# EAGLE board intech-senpai-camion-grue-complet (EAGLE 8.6.0), part 1 of 3
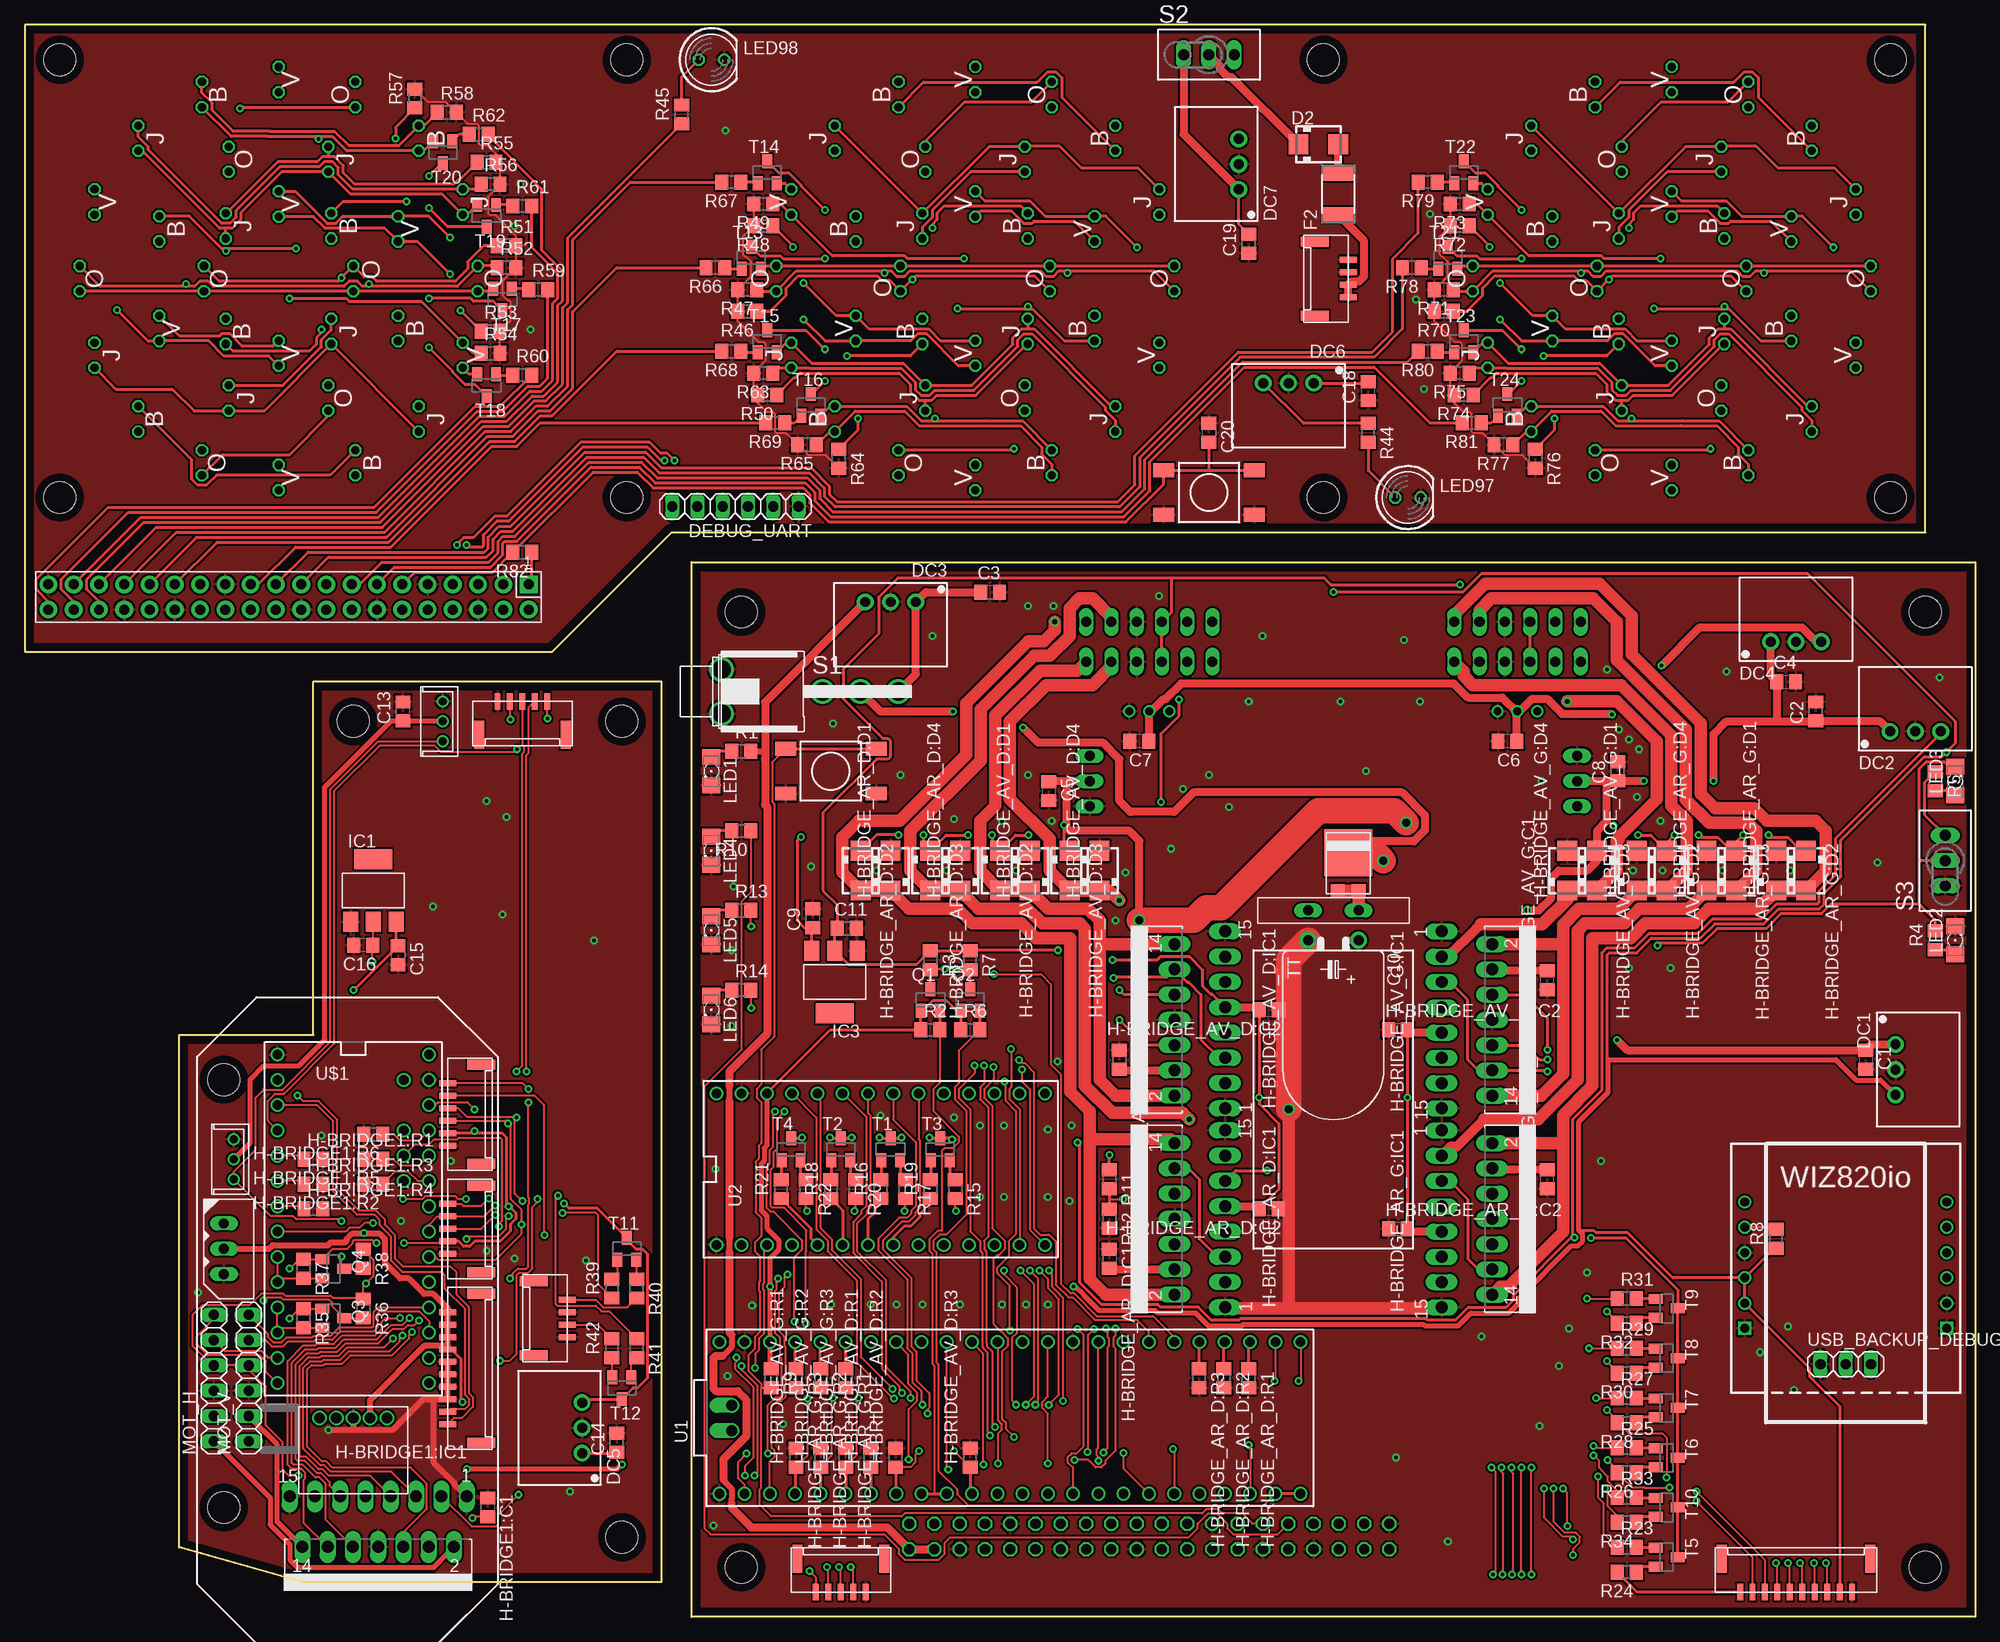
[diagram p0: board, top side]
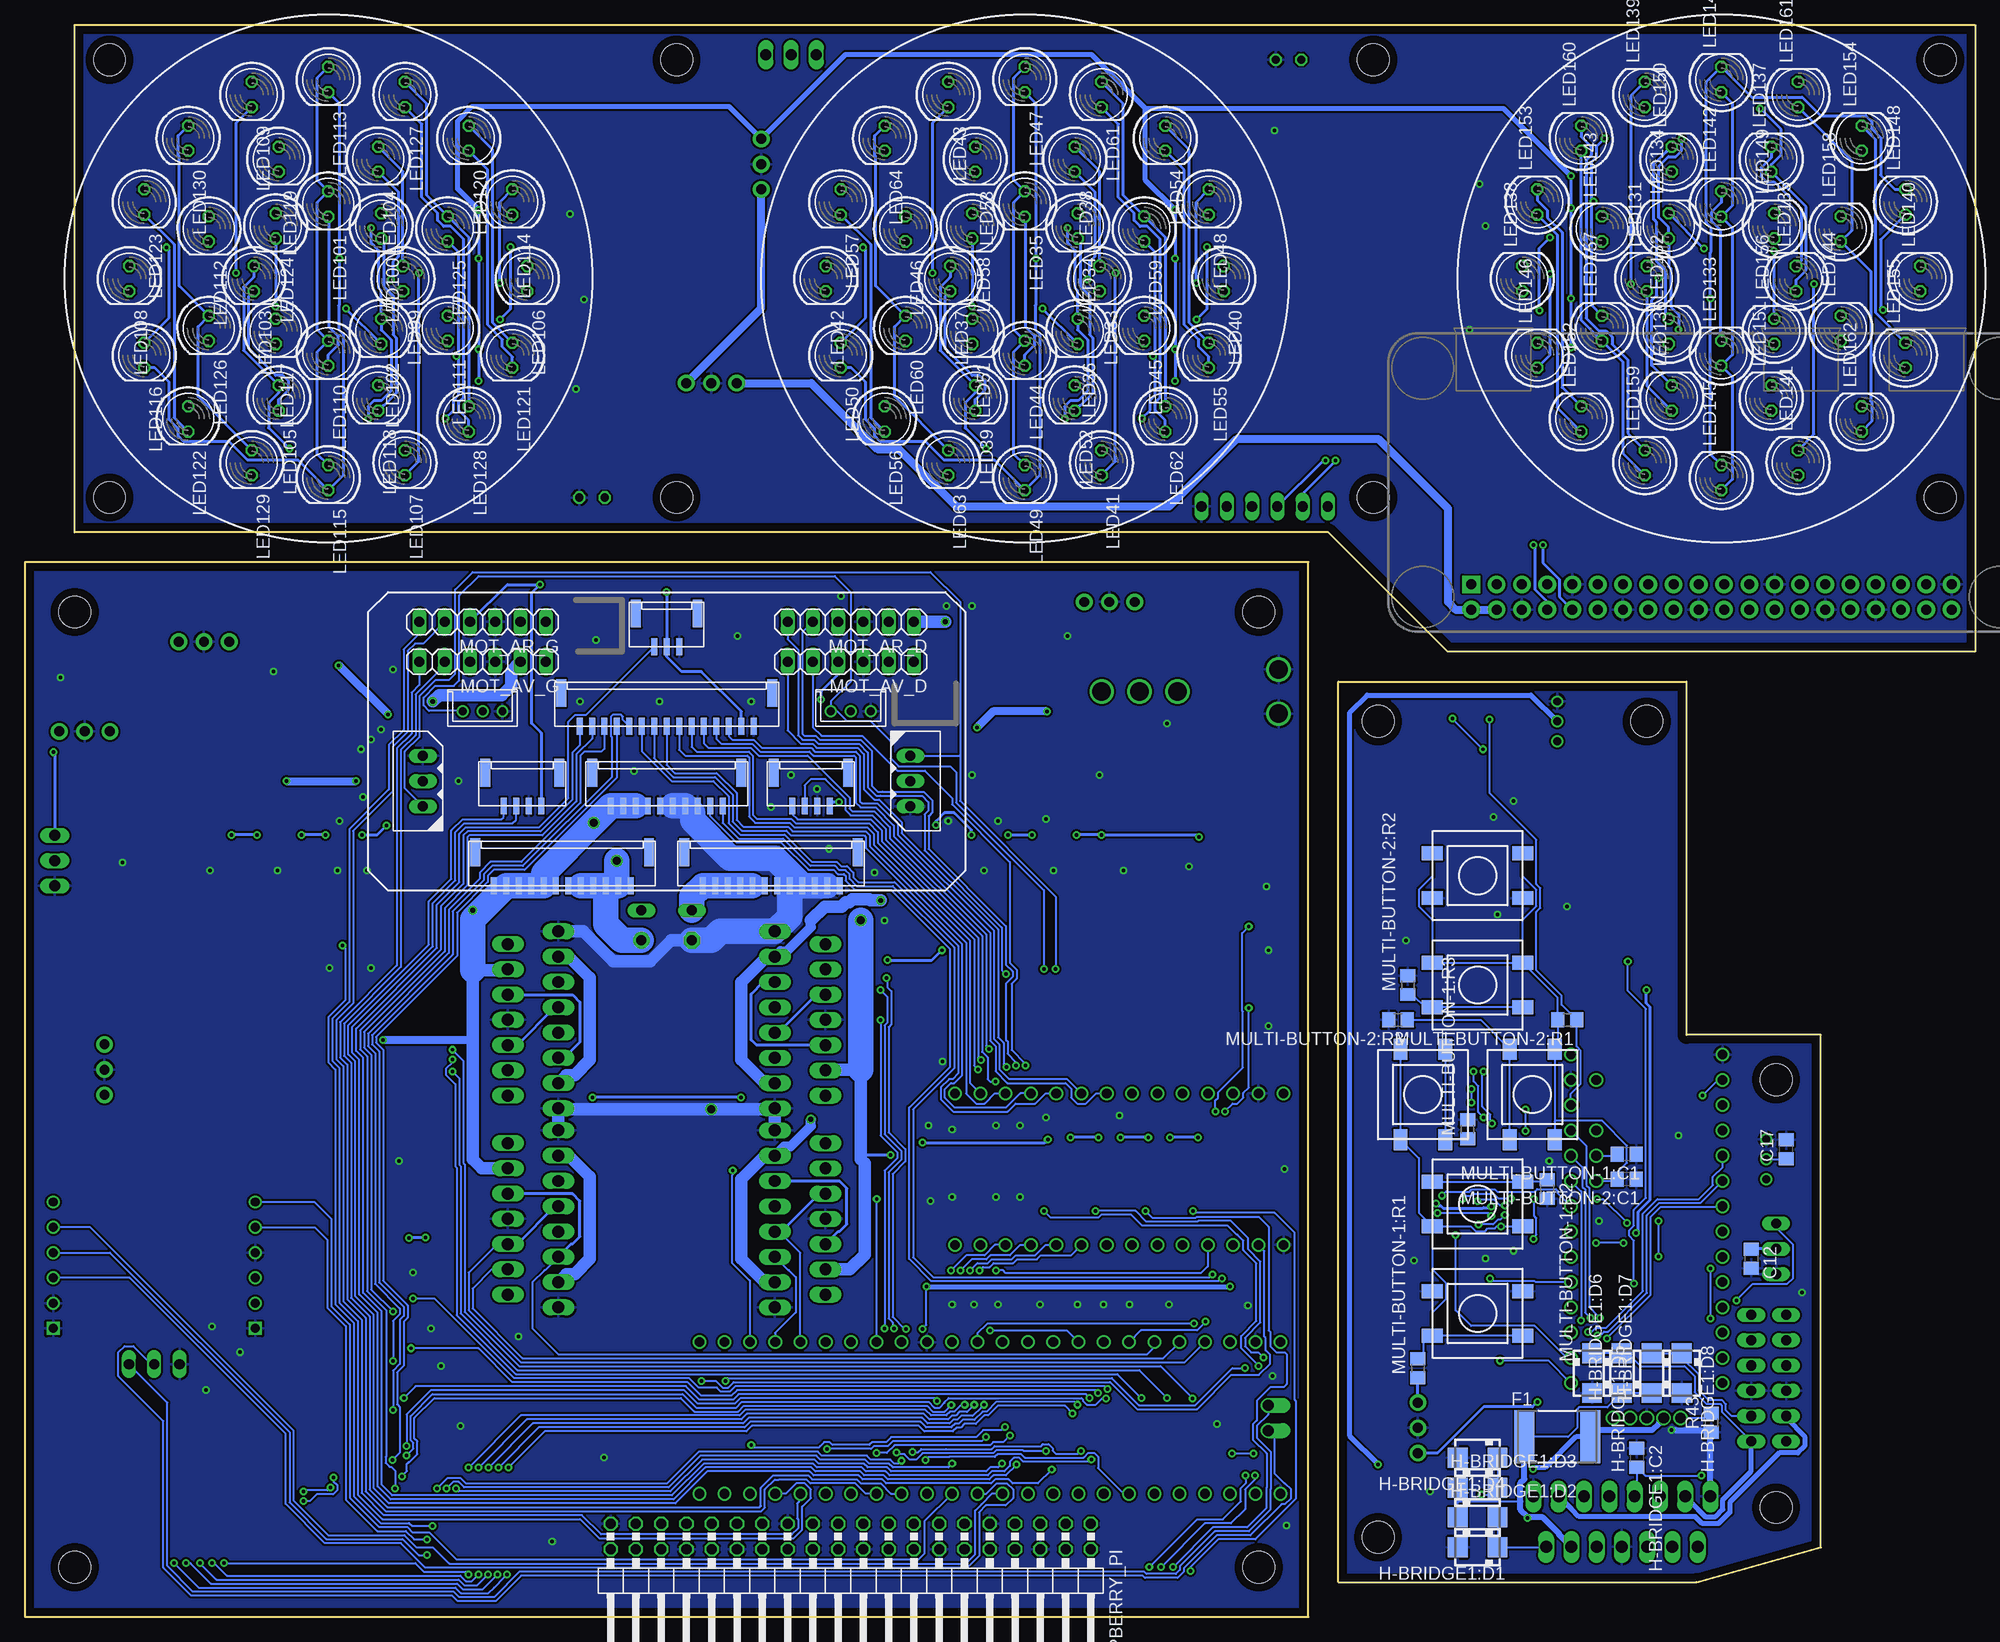
[diagram p1: board, bottom side, seen from below]

Size 196 x 160 mm. Coordinates in mm from the lower left corner, seen from the top.
Outline: 67,0 67,106 196,106 196,0 67,0
Outline: 64,3.5 64,94 29,94 29,58.5 15.5,58.5 15.5,7 28,3.5 64,3.5
Outline: 191,109 191,160 0,160 0,97 53,97 65,109 191,109
Copper layers (1*16): Top 0.035mm / dielectric 1.5mm / Bottom 0.035mm
Design rules "sg_default *": minimum track width 0.2mm, minimum drill 0.35mm, track to track 0.2mm, track to pad 0.2mm, pad to pad 0.2mm, via to via 0.2mm, smd to smd 0.2mm, copper to edge 0.8mm, drill to drill 0.2mm, minimum pad ring 0.2mm, minimum via ring 8mil, stop-mask expansion 4mil, vias tented up to drill 1mm, thermal gap 10mil
Holes 3.2 mm at 72,5 72,101 191,101 191,5 60,8 20,11 20,54 60,90 33,90 3.5,112.5 3.5,156.5 187.5,112.5 187.5,156.5 130.5,112.5 130.5,156.5 60.5,112.5 60.5,156.5
tKeepout: area 17,8 to 23,14; area 17,51 to 23,57; area 57,5 to 63,11; area 30,87 to 36,93; area 57,87 to 63,93
bKeepout: area 15.5,6.5 to 24.5,15.5; area 15.5,49.5 to 24.5,58.5; area 55.5,3.5 to 64.5,12.5; area 55.5,85.5 to 64.5,94.5; area 28.5,85.5 to 37.5,94.5

## Footprints (pad centres in the part's own frame; a part is rotated, then mirrored left to right if it is on the bottom)
GH-12-V = smd 0.6 x 1.7: 1 -6.875,2.5; 2 -5.625,2.5; 3 -4.375,2.5; 4 -3.125,2.5; 5 -1.875,2.5; 6 -0.625,2.5; 7 0.625,2.5; 8 1.875,2.5; 9 3.125,2.5; 10 4.375,2.5; 11 5.625,2.5; 12 6.875,2.5 | smd 1 x 2.8: CASE0 8.725,-0.85; CASE1 -8.725,-0.85
DYNAMIXEL_AX_1X03 = drill 1 long: DATA 2.54,0; DYN_VCC 0,0; GND -2.54,0
C0805 = smd 1.3 x 1.5: 1 -0.95,0; 2 0.95,0
TT5D11L = drill 1 pad 1.676: + -2.54,0 | drill 1 pad 1.676 octagon: - 2.54,0
TO-277A = smd 1.4 x 1.27: +1 -1.04,-1; +2 1.04,-1 | smd 4.8 x 4.72: - 0,2.81
SMA = smd 2 x 2: A 2,0; C -2,0
SIP3 = drill 1 pad 1.676: 1 -2.54,0; 2 0,0; 3 2.54,0
DC-DC-CONVERTER = drill 1.07 pad 1.47: GND 0,0; ON-OFF -3.4,0; TRIM+ 3.4,0; VIN -1.7,0; VOUT 1.7,0
1X06 = drill 1.016 long: 1 -6.35,0; 2 -3.81,0; 3 -1.27,0; 4 1.27,0; 5 3.81,0; 6 6.35,0
GH-05-V = smd 0.6 x 1.7: 1 -2.5,2.5; 2 -1.25,2.5; 3 0,2.5; 4 1.25,2.5; 5 2.5,2.5 | smd 1 x 2.8: CASE0 4.35,-0.85; CASE1 -4.35,-0.85
GH-15-V = smd 0.6 x 1.7: 1 -8.75,2.5; 2 -7.5,2.5; 3 -6.25,2.5; 4 -5,2.5; 5 -3.75,2.5; 6 -2.5,2.5; 7 -1.25,2.5; 8 0,2.5; 9 1.25,2.5; 10 2.5,2.5; 11 3.75,2.5; 12 5,2.5; 13 6.25,2.5; 14 7.5,2.5; 15 8.75,2.5 | smd 1 x 2.8: CASE0 10.6,-0.85; CASE1 -10.6,-0.85
GH-04-V = smd 0.6 x 1.7: 1 -1.875,2.5; 2 -0.625,2.5; 3 0.625,2.5; 4 1.875,2.5 | smd 1 x 2.8: CASE0 3.725,-0.85; CASE1 -3.725,-0.85
MF-LSMF300 = smd 2 x 5.3: 1 -3.3,0; 2 3.3,0
MF-MSMF110 = smd 1.5 x 3.2: 1 -2.1,0; 2 2.1,0
GH-10-V = smd 0.6 x 1.7: 1 -5.625,2.5; 2 -4.375,2.5; 3 -3.125,2.5; 4 -1.875,2.5; 5 -0.625,2.5; 6 0.625,2.5; 7 1.875,2.5; 8 3.125,2.5; 9 4.375,2.5; 10 5.625,2.5 | smd 1 x 2.8: CASE0 7.475,-0.85; CASE1 -7.475,-0.85
MULTIWATT-15 = drill 1.2 long: 1 -8.89,-7.62; 2 -7.62,-2.54; 3 -6.35,-7.62; 4 -5.08,-2.54; 5 -3.81,-7.62; 6 -2.54,-2.54; 7 -1.27,-7.62; 8 0,-2.54; 9 1.27,-7.62; 10 2.54,-2.54; 11 3.81,-7.62; 12 5.08,-2.54; 13 6.35,-7.62; 14 7.62,-2.54; 15 8.89,-7.62
R0805 = smd 1.3 x 1.5: 1 -0.95,0; 2 0.95,0
SOT223 = smd 1.499 x 2.007: 1 -2.261,-3.15; 2 0.025,-3.15; 3 2.311,-3.15 | smd 3.81 x 2.007: 4 0,3.15
GH-03-V = smd 0.6 x 1.7: 1 -1.25,2.5; 2 0,2.5; 3 1.25,2.5 | smd 1 x 2.8: CASE0 3.1,-0.85; CASE1 -3.1,-0.85
1206 = smd 1.6 x 1.803: A -1.422,0; C 1.422,0
LED5MM = drill 0.813 octagon: A -1.27,0; K 1.27,0
PUSH-BUTTON = smd 1.4 x 2.1: 1 2.25,4.55; 2 2.25,-4.55; 3 -2.25,4.55; 4 -2.25,-4.55
5MM = drill 1 long: P$1 -2.54,0; P$2 2.54,0
SOT23 = smd 1 x 1.4: 1 -0.95,-1.1; 2 0.95,-1.1; 3 0,1.1
2X20/90 = drill 1.016 octagon: 1 -24.13,-6.35; 2 -24.13,-3.81; 3 -21.59,-6.35; 4 -21.59,-3.81; 5 -19.05,-6.35; 6 -19.05,-3.81; 7 -16.51,-6.35; 8 -16.51,-3.81; 9 -13.97,-6.35; 10 -13.97,-3.81; 11 -11.43,-6.35; 12 -11.43,-3.81; 13 -8.89,-6.35; 14 -8.89,-3.81; 15 -6.35,-6.35; 16 -6.35,-3.81; 17 -3.81,-6.35; 18 -3.81,-3.81; 19 -1.27,-6.35; 20 -1.27,-3.81; 21 1.27,-6.35; 22 1.27,-3.81; 23 3.81,-6.35; 24 3.81,-3.81; 25 6.35,-6.35; 26 6.35,-3.81; 27 8.89,-6.35; 28 8.89,-3.81; 29 11.43,-6.35; 30 11.43,-3.81; 31 13.97,-6.35; 32 13.97,-3.81; 33 16.51,-6.35; 34 16.51,-3.81; 35 19.05,-6.35; 36 19.05,-3.81; 37 21.59,-6.35; 38 21.59,-3.81; 39 24.13,-6.35; 40 24.13,-3.81
RASPBERRYPI_BASTELSTUBE_V13_RASPI_BOARD_B+_FULL = drill 1 pad 1.778 square: 1 8.37,25.23 | drill 1 pad 1.778: 2 8.37,27.77; 3 10.91,25.23; 4 10.91,27.77; 5 13.45,25.23; 6 13.45,27.77; 7 15.99,25.23; 8 15.99,27.77; 9 18.53,25.23; 10 18.53,27.77; 11 21.07,25.23; 12 21.07,27.77; 13 23.61,25.23; 14 23.61,27.77; 15 26.15,25.23; 16 26.15,27.77; 17 28.69,25.23; 18 28.69,27.77; 19 31.23,25.23; 20 31.23,27.77; 21 33.77,25.23; 22 33.77,27.77; 23 36.31,25.23; 24 36.31,27.77; 25 38.85,25.23; 26 38.85,27.77; 27 41.39,25.23; 28 41.39,27.77; 29 43.93,25.23; 30 43.93,27.77; 31 46.47,25.23; 32 46.47,27.77; 33 49.01,25.23; 34 49.01,27.77; 35 51.55,25.23; 36 51.55,27.77; 37 54.09,25.23; 38 54.09,27.77; 39 56.63,25.23; 40 56.63,27.77
SWITCH_LPV-1 = drill 1.85: 1 0,10.16; 2 0,13.97; 3 0,17.78; B -2.225,0; B1 2.225,0
TL3XPO = drill 1.1 pad 1.422 long: 1 -2.54,0; 2 0,0; 3 2.54,0
SOT23-BEC = smd 1 x 1.4: B -0.95,-1.1; C 0,1.1; E 0.95,-1.1
GH-06-V = smd 0.6 x 1.7: 1 -3.125,2.5; 2 -1.875,2.5; 3 -0.625,2.5; 4 0.625,2.5; 5 1.875,2.5; 6 3.125,2.5 | smd 1 x 2.8: CASE0 4.975,-0.85; CASE1 -4.975,-0.85
TEENSY_3.5_DIL+USB = drill 0.965: 0 -7.62,26.67; 1 -7.62,24.13; 2 -7.62,21.59; 3 -7.62,19.05; 3.3V 7.62,24.13; 3.3V3 -7.62,-6.35; 4 -7.62,16.51; 5 -7.62,13.97; 6 -7.62,11.43; 7 -7.62,8.89; 8 -7.62,6.35; 9 -7.62,3.81; 10 -7.62,1.27; 11 -7.62,-1.27; 12 -7.62,-3.81; 13 7.62,-3.81; 14/A0 7.62,-1.27; 15/A1 7.62,1.27; 16/A2 7.62,3.81; 17/A3 7.62,6.35; 18/A4 7.62,8.89; 19/A5 7.62,11.43; 20/A6 7.62,13.97; 21/A7 7.62,16.51; 22/A8 7.62,19.05; 23/A9 7.62,21.59; 24 -7.62,-8.89; 25 -7.62,-11.43; 26 -7.62,-13.97; 27 -7.62,-16.51; 28 -7.62,-19.05; 29 -7.62,-21.59; 30 -7.62,-24.13; 31/A12 -7.62,-26.67; 32/A13 -7.62,-29.21; 33/A14 7.62,-29.21; 34/A15 7.62,-26.67; 35/A16 7.62,-24.13; 36/A17 7.62,-21.59; 37/A18 7.62,-19.05; 38/A19 7.62,-16.51; 39/A20 7.62,-13.97; A21 7.62,-11.43; A22 7.62,-8.89; AGND 7.62,26.67; GND -7.62,29.21; GND1 7.62,-6.35; VIN 7.62,29.21 | drill 1.1 offset: USBD+ -1.27,27.94; USBD- 1.27,27.94
TEENSY_3.0-3.2&LC_DIL = drill 0.965: 0 -7.62,13.97; 1 -7.62,11.43; 2 -7.62,8.89; 3 -7.62,6.35; 3.3V 7.62,11.43; 4 -7.62,3.81; 5 -7.62,1.27; 6 -7.62,-1.27; 7 -7.62,-3.81; 8 -7.62,-6.35; 9 -7.62,-8.89; 10 -7.62,-11.43; 11 -7.62,-13.97; 12 -7.62,-16.51; 13 7.62,-16.51; 14/A0 7.62,-13.97; 15/A1 7.62,-11.43; 16/A2 7.62,-8.89; 17/A3 7.62,-6.35; 18/A4 7.62,-3.81; 19/A5 7.62,-1.27; 20/A6 7.62,1.27; 21/A7 7.62,3.81; 22/A8 7.62,6.35; 23/A9 7.62,8.89; AGND 7.62,13.97; GND -7.62,16.51; VIN 7.62,16.51
TEENSY_3.0-3.2&LC_DIL+4 = drill 0.965: 0 -7.62,13.97; 1 -7.62,11.43; 2 -7.62,8.89; 3 -7.62,6.35; 3.3V 7.62,11.43; 4 -7.62,3.81; 5 -7.62,1.27; 6 -7.62,-1.27; 7 -7.62,-3.81; 8 -7.62,-6.35; 9 -7.62,-8.89; 10 -7.62,-11.43; 11 -7.62,-13.97; 12 -7.62,-16.51; 13 7.62,-16.51; 14/A0 7.62,-13.97; 15/A1 7.62,-11.43; 16/A2 7.62,-8.89; 17/A3 7.62,-6.35; 18/A4 7.62,-3.81; 19/A5 7.62,-1.27; 20/A6 7.62,1.27; 21/A7 7.62,3.81; 22/A8 7.62,6.35; 23/A9 7.62,8.89; A10 5.08,6.35; A11 5.08,3.81; AGND 7.62,13.97; AREF 5.08,8.89; GND -7.62,16.51; VIN 7.62,16.51; VUSB 5.08,13.97
WIZ820 = drill 0.9 square: GND1 -10.16,0; GND3 10.16,0 | drill 0.9: GND2 -10.16,-2.54; INT -10.16,-12.7; MISO 10.16,-12.7; MOSI -10.16,-5.08; PWDN 10.16,-7.62; RESET 10.16,-10.16; SCLK -10.16,-7.62; SS -10.16,-10.16; VIN1 10.16,-2.54; VIN2 10.16,-5.08
1X03 = drill 1.016 long: 1 -2.54,0; 2 0,0; 3 2.54,0
DYNAMIXEL_XL_1X03 = drill 0.8: DATA 2,0; GND -2,0; VCC 0,0

## Placement (x,y rotation side)
ARRET_URGENCE  JST-12  [GH-12-V]  142,76 180 bottom
AX12_D  DYNAMIXEL-1X03AX  [DYNAMIXEL_AX_1X03]  107,84 90 bottom
AX12_G  DYNAMIXEL-1X03AX  [DYNAMIXEL_AX_1X03]  156,84 270 bottom
AX12_G1  DYNAMIXEL-1X03AX  [DYNAMIXEL_AX_1X03]  20,37 90 top
C1  10µF  [C0805]  185,56 270 top
C2  10µF  [C0805]  180,91 90 top
C3  10µF  [C0805]  97,103 0 top
C4  10µF  [C0805]  177,94 0 top
C5  1µF  [C0805]  102.9,83 270 top
C6  1µF  [C0805]  149,88 180 top
C7  1µF  [C0805]  112,88 180 top
C8  1µF  [C0805]  160.1,85 90 top
C9  10µF  [C0805]  79.2,70.2 90 top
C10  4700µF  [TT5D11L]  131.5,68 180 top
C11  22µF  [C0805]  82.6,69.2 0 top
C12  1µF  [C0805]  22.5,36 270 bottom
C13  1µF  [C0805]  38,91 90 top
C14  10µF  [C0805]  59.5,17.5 90 top
C15  10µF  [C0805]  37.5,66.5 270 top
C16  22µF  [C0805]  34,67.5 180 top
C17  1µF  [C0805]  19,47 90 bottom
C18  10µF  [C0805]  135,123.2 90 top
C19  10µF  [C0805]  123,138 90 top
C20  10µF  [C0805]  119,119 270 top
D1  DIODE_S15P45  [TO-277A]  133,74 0 top
D2  S1M  [SMA]  130,148 0 top
DC1  R-78C3.3-1.0  [SIP3]  188,55 270 top
DC2  R-78C3.3-1.0  [SIP3]  190,89 0 top
DC3  R-78C5.0-1.0  [SIP3]  87,102 180 top
DC4  R-78C9.0-1.0  [SIP3]  178,98 0 top
DC5  R-78C3.3-1.0  [SIP3]  56,19 90 top
DC6  R-78C5.0-1.0  [SIP3]  127,124 180 top
DC7  R-78C3.3-1.0  [SIP3]  122,146 90 top
DC-DC-6V  DC-DC-CONVERTER  [DC-DC-CONVERTER]  33,20 180 top
DEBUG_UART  [1X06]  71.4,111.6 180 top
DEL_GYRO  JST-05  [GH-05-V]  82,5 180 top
DELS_ET_TOF_AR  JST-15  [GH-15-V]  131.5,92 180 bottom
ENCODEUR_DROIT  JST-04GH-V  [GH-04-V]  117,84 180 bottom
ENCODEUR_GAUCHE  JST-04GH-V  [GH-04-V]  146,84 180 bottom
F1  MF-LSMF300  [MF-LSMF300]  42,18.1 0 bottom
F2  MF-MSMF110  [MF-MSMF110]  132,143 90 top
GRUE  JST-10  [GH-10-V]  131.5,84 180 bottom
GRUE1  JST-10  [GH-10-V]  45,25 90 top
GYRO  JST-04GH-V  [GH-04-V]  52,30 270 top
H-BRIDGE1:C1  100nF  [C0805]  46.5,11 270 top
H-BRIDGE1:C2  100nF  [C0805]  34,16 270 bottom
H-BRIDGE1:D1  S1M  [SMA]  50,7 180 bottom
H-BRIDGE1:D2  S1M  [SMA]  50,10 0 bottom
H-BRIDGE1:D3  S1M  [SMA]  50,13 0 bottom
H-BRIDGE1:D4  S1M  [SMA]  50,16 180 bottom
H-BRIDGE1:D5  S1M  [SMA]  38.5,24.5 270 bottom
H-BRIDGE1:D6  S1M  [SMA]  35.5,24.5 90 bottom
H-BRIDGE1:D7  S1M  [SMA]  32.5,24.5 90 bottom
H-BRIDGE1:D8  S1M  [SMA]  29.5,24.5 270 bottom
H-BRIDGE1:IC1  L298  [MULTIWATT-15]  35.5,4.5 180 top
H-BRIDGE1:R1  10k  [R0805]  29,46 0 top
H-BRIDGE1:R2  10k  [R0805]  35,43.5 180 top
H-BRIDGE1:R3  10k  [R0805]  29,43.5 0 top
H-BRIDGE1:R4  10k  [R0805]  29,41 0 top
H-BRIDGE1:R5  10k  [R0805]  35,46 180 top
H-BRIDGE1:R6  10k  [R0805]  35,48.5 180 top
H-BRIDGE_AR_D:C1  100nF  [C0805]  109,36 270 top
H-BRIDGE_AR_D:C2  100nF  [C0805]  125,41 180 top
H-BRIDGE_AR_D:D1  S1M  [SMA]  87,75 90 top
H-BRIDGE_AR_D:D2  S1M  [SMA]  84,75 270 top
H-BRIDGE_AR_D:D3  S1M  [SMA]  91,75 270 top
H-BRIDGE_AR_D:D4  S1M  [SMA]  94,75 90 top
H-BRIDGE_AR_D:IC1  L298  [MULTIWATT-15]  113,40 90 top
H-BRIDGE_AR_D:R1  10k  [R0805]  123,24 270 top
H-BRIDGE_AR_D:R2  10k  [R0805]  120.5,24 270 top
H-BRIDGE_AR_D:R3  10k  [R0805]  118,24 270 top
H-BRIDGE_AR_G:C1  100nF  [C0805]  153,44 90 top
H-BRIDGE_AR_G:C2  100nF  [C0805]  138,39 0 top
H-BRIDGE_AR_G:D1  S1M  [SMA]  176,75 90 top
H-BRIDGE_AR_G:D2  S1M  [SMA]  179,75 270 top
H-BRIDGE_AR_G:D3  S1M  [SMA]  172,75 270 top
H-BRIDGE_AR_G:D4  S1M  [SMA]  169,75 90 top
H-BRIDGE_AR_G:IC1  L298  [MULTIWATT-15]  150,40 270 top
H-BRIDGE_AR_G:R1  10k  [R0805]  82.5,24 270 top
H-BRIDGE_AR_G:R2  10k  [R0805]  80,24 270 top
H-BRIDGE_AR_G:R3  10k  [R0805]  77.5,24 270 top
H-BRIDGE_AV_D:C1  100nF  [C0805]  110,56 270 top
H-BRIDGE_AV_D:C2  100nF  [C0805]  125,61 180 top
H-BRIDGE_AV_D:D1  S1M  [SMA]  101,75 90 top
H-BRIDGE_AV_D:D2  S1M  [SMA]  98,75 270 top
H-BRIDGE_AV_D:D3  S1M  [SMA]  105,75 270 top
H-BRIDGE_AV_D:D4  S1M  [SMA]  108,75 90 top
H-BRIDGE_AV_D:IC1  L298  [MULTIWATT-15]  113,60 90 top
H-BRIDGE_AV_D:R1  10k  [R0805]  85,16 90 top
H-BRIDGE_AV_D:R2  10k  [R0805]  87.5,16 90 top
H-BRIDGE_AV_D:R3  10k  [R0805]  95,16 90 top
H-BRIDGE_AV_G:C1  100nF  [C0805]  153,64 90 top
H-BRIDGE_AV_G:C2  100nF  [C0805]  138,59 0 top
H-BRIDGE_AV_G:D1  S1M  [SMA]  162,75 90 top
H-BRIDGE_AV_G:D2  S1M  [SMA]  165,75 270 top
H-BRIDGE_AV_G:D3  S1M  [SMA]  158,75 270 top
H-BRIDGE_AV_G:D4  S1M  [SMA]  155,75 90 top
H-BRIDGE_AV_G:IC1  L298  [MULTIWATT-15]  150,60 270 top
H-BRIDGE_AV_G:R1  10k  [R0805]  77.5,16 90 top
H-BRIDGE_AV_G:R2  10k  [R0805]  80,16 90 top
H-BRIDGE_AV_G:R3  10k  [R0805]  82.5,16 90 top
IC1  REG1117  [SOT223]  35,73 0 top
IC3  REG1117  [SOT223]  81.4,63.8 180 top
JUMPER  JST-03  [GH-03-V]  131.5,100 180 bottom
LED1  blue  [1206]  69,85 270 top
LED2  green  [1206]  194,68 90 top
LED3  orange  [1206]  194,84 90 top
LED4  red  [1206]  69,77 270 top
LED5  blue  [1206]  69,69 270 top
LED6  red  [1206]  69,61 270 top
LED33  orange  [LED5MM]  88,134.5 270 bottom
LED34  jaune  [LED5MM]  90.2,139.8 270 bottom
LED35  vert  [LED5MM]  95.5,142 270 bottom
LED36  bleu  [LED5MM]  90.2,129.2 270 bottom
LED37  orange  [LED5MM]  103,134.5 270 bottom
LED38  orange  [LED5MM]  90.5,146.5 270 bottom
LED39  orange  [LED5MM]  100.5,122.5 270 bottom
LED40  orange  [LED5MM]  75.5,134.5 270 bottom
LED41  orange  [LED5MM]  87.8,116 270 bottom
LED42  orange  [LED5MM]  115.5,134.5 270 bottom
LED43  orange  [LED5MM]  103.2,153 270 bottom
LED44  vert  [LED5MM]  95.5,127 270 bottom
LED45  vert  [LED5MM]  83.5,129.5 270 bottom
LED46  vert  [LED5MM]  107.5,139.5 270 bottom
LED47  vert  [LED5MM]  95.5,154.5 270 bottom
LED48  vert  [LED5MM]  77,142.2 270 bottom
LED49  vert  [LED5MM]  95.5,114.5 270 bottom
LED50  vert  [LED5MM]  114,126.8 270 bottom
LED51  jaune  [LED5MM]  100.8,129.2 270 bottom
LED52  jaune  [LED5MM]  90.5,122.5 270 bottom
LED53  jaune  [LED5MM]  100.5,146.5 270 bottom
LED54  jaune  [LED5MM]  81.4,148.6 270 bottom
LED55  jaune  [LED5MM]  77,126.8 270 bottom
LED56  jaune  [LED5MM]  109.6,120.4 270 bottom
LED57  jaune  [LED5MM]  114,142.2 270 bottom
LED58  bleu  [LED5MM]  100.8,139.8 270 bottom
LED59  bleu  [LED5MM]  83.5,139.5 270 bottom
LED60  bleu  [LED5MM]  107.5,129.5 270 bottom
LED61  bleu  [LED5MM]  87.8,153 270 bottom
LED62  bleu  [LED5MM]  81.4,120.4 270 bottom
LED63  bleu  [LED5MM]  103.2,116 270 bottom
LED64  bleu  [LED5MM]  109.6,148.6 270 bottom
LED97  vert  [LED5MM]  139,112.5 0 top
LED98  bleu  [LED5MM]  69,156.5 0 top
LED99  orange  [LED5MM]  158,134.5 270 bottom
LED100  jaune  [LED5MM]  160.2,139.8 270 bottom
LED101  vert  [LED5MM]  165.5,142 270 bottom
LED102  bleu  [LED5MM]  160.2,129.2 270 bottom
LED103  orange  [LED5MM]  173,134.5 270 bottom
LED104  orange  [LED5MM]  160.5,146.5 270 bottom
LED105  orange  [LED5MM]  170.5,122.5 270 bottom
LED106  orange  [LED5MM]  145.5,134.5 270 bottom
LED107  orange  [LED5MM]  157.8,116 270 bottom
LED108  orange  [LED5MM]  185.5,134.5 270 bottom
LED109  orange  [LED5MM]  173.2,153 270 bottom
LED110  vert  [LED5MM]  165.5,127 270 bottom
LED111  vert  [LED5MM]  153.5,129.5 270 bottom
LED112  vert  [LED5MM]  177.5,139.5 270 bottom
LED113  vert  [LED5MM]  165.5,154.5 270 bottom
LED114  vert  [LED5MM]  147,142.2 270 bottom
LED115  vert  [LED5MM]  165.5,114.5 270 bottom
LED116  vert  [LED5MM]  184,126.8 270 bottom
LED117  jaune  [LED5MM]  170.8,129.2 270 bottom
LED118  jaune  [LED5MM]  160.5,122.5 270 bottom
LED119  jaune  [LED5MM]  170.5,146.5 270 bottom
LED120  jaune  [LED5MM]  151.4,148.6 270 bottom
LED121  jaune  [LED5MM]  147,126.8 270 bottom
LED122  jaune  [LED5MM]  179.6,120.4 270 bottom
LED123  jaune  [LED5MM]  184,142.2 270 bottom
LED124  bleu  [LED5MM]  170.8,139.8 270 bottom
LED125  bleu  [LED5MM]  153.5,139.5 270 bottom
LED126  bleu  [LED5MM]  177.5,129.5 270 bottom
LED127  bleu  [LED5MM]  157.8,153 270 bottom
LED128  bleu  [LED5MM]  151.4,120.4 270 bottom
LED129  bleu  [LED5MM]  173.2,116 270 bottom
LED130  bleu  [LED5MM]  179.6,148.6 270 bottom
LED131  orange  [LED5MM]  33,134.5 90 bottom
LED132  jaune  [LED5MM]  30.8,129.2 90 bottom
LED133  vert  [LED5MM]  25.5,127 90 bottom
LED134  bleu  [LED5MM]  30.8,139.8 90 bottom
LED135  orange  [LED5MM]  18,134.5 90 bottom
LED136  orange  [LED5MM]  30.5,122.5 90 bottom
LED137  orange  [LED5MM]  20.5,146.5 90 bottom
LED138  orange  [LED5MM]  45.5,134.5 90 bottom
LED139  orange  [LED5MM]  33.2,153 90 bottom
LED140  orange  [LED5MM]  5.5,134.5 90 bottom
LED141  orange  [LED5MM]  17.8,116 90 bottom
LED142  vert  [LED5MM]  25.5,142 90 bottom
LED143  vert  [LED5MM]  37.5,139.5 90 bottom
LED144  vert  [LED5MM]  13.5,129.5 90 bottom
LED145  vert  [LED5MM]  25.5,114.5 90 bottom
LED146  vert  [LED5MM]  44,126.8 90 bottom
LED147  vert  [LED5MM]  25.5,154.5 90 bottom
LED148  vert  [LED5MM]  7,142.2 90 bottom
LED149  jaune  [LED5MM]  20.2,139.8 90 bottom
LED150  jaune  [LED5MM]  30.5,146.5 90 bottom
LED151  jaune  [LED5MM]  20.5,122.5 90 bottom
LED152  jaune  [LED5MM]  39.6,120.4 90 bottom
LED153  jaune  [LED5MM]  44,142.2 90 bottom
LED154  jaune  [LED5MM]  11.4,148.6 90 bottom
LED155  jaune  [LED5MM]  7,126.8 90 bottom
LED156  bleu  [LED5MM]  20.2,129.2 90 bottom
LED157  bleu  [LED5MM]  37.5,129.5 90 bottom
LED158  bleu  [LED5MM]  13.5,139.5 90 bottom
LED159  bleu  [LED5MM]  33.2,116 90 bottom
LED160  bleu  [LED5MM]  39.6,148.6 90 bottom
LED161  bleu  [LED5MM]  17.8,153 90 bottom
LED162  bleu  [LED5MM]  11.4,120.4 90 bottom
LIPO  JST-12  [GH-12-V]  121,76 180 bottom
LIPO1  JST-04GH-V  [GH-04-V]  130.5,134.5 270 top
MOT_AR_D  [1X06]  113,100 180 bottom
MOT_AR_G  [1X06]  150,100 180 bottom
MOT_AV_D  [1X06]  113,96 180 bottom
MOT_AV_G  [1X06]  150,96 180 bottom
MOT_H  [1X06]  19,24 90 top
MOT_V  [1X06]  22.5,24 90 top
MULTI-BUTTON-1:C1  1µF  [C0805]  35,46.5 180 bottom
MULTI-BUTTON-1:R1  4k7  [R0805]  56,25 90 bottom
MULTI-BUTTON-1:R2  2k2  [R0805]  43,43 270 bottom
MULTI-BUTTON-1:R3  10k  [R0805]  51,49 90 bottom
MULTI-BUTTON-1:U1  PUSH-BUTTON  [PUSH-BUTTON]  55.5,52.5 180 bottom
MULTI-BUTTON-1:U2  PUSH-BUTTON  [PUSH-BUTTON]  50,41.5 270 bottom
MULTI-BUTTON-1:U3  PUSH-BUTTON  [PUSH-BUTTON]  50,30.5 270 bottom
MULTI-BUTTON-2:C1  1µF  [C0805]  35,44 180 bottom
MULTI-BUTTON-2:R1  4k7  [R0805]  41,60 180 bottom
MULTI-BUTTON-2:R2  2k2  [R0805]  57,63.5 90 bottom
MULTI-BUTTON-2:R3  10k  [R0805]  58,60 180 bottom
MULTI-BUTTON-2:U1  PUSH-BUTTON  [PUSH-BUTTON]  44.5,52.5 0 bottom
MULTI-BUTTON-2:U2  PUSH-BUTTON  [PUSH-BUTTON]  50,63.5 90 bottom
MULTI-BUTTON-2:U3  PUSH-BUTTON  [PUSH-BUTTON]  50,74.5 90 bottom
P1  RGEF800  [5MM]  131.5,71 180 top
PHARES_ET_TOF_AV  JST-10  [GH-10-V]  178,5 180 top
Q1  BSS138  [SOT23]  91,62 0 top
Q2  BSS138  [SOT23]  95,62 0 top
Q3  BSS138  [SOT23]  31,30 270 top
Q4  BSS138  [SOT23]  31,35 270 top
R1  470  [R0805]  72,87 0 top
R2  10k  [R0805]  91,59 0 top
R3  10k  [R0805]  91,66 270 top
R4  330  [R0805]  192,68 90 top
R5  330  [R0805]  192,84 270 top
R6  10k  [R0805]  95,59 0 top
R7  10k  [R0805]  95,66 270 top
R8  10k  [R0805]  176,38 90 top
R9  10k  [R0805]  75,24 270 top
R10  330  [R0805]  72,79 180 top
R11  22k  [R0805]  109,44 270 top
R12  6k8  [R0805]  109,40 270 top
R13  330  [R0805]  72,71 0 top
R14  330  [R0805]  72,63 0 top
R15  0  [R0805]  93.5,43 270 top
R16  270  [R0805]  86,43 90 top
R17  0  [R0805]  88.5,43 270 top
R18  270  [R0805]  81,43 90 top
R19  270  [R0805]  91,43 90 top
R20  0  [R0805]  83.5,43 270 top
R21  270  [R0805]  76,43 90 top
R22  0  [R0805]  78.5,43 270 top
R23  270  [R0805]  161,7 0 top
R24  0  [R0805]  161,4.5 180 top
R25  270  [R0805]  161,17 0 top
R26  0  [R0805]  161,14.5 180 top
R27  270  [R0805]  161,22 0 top
R28  0  [R0805]  161,19.5 180 top
R29  270  [R0805]  161,27 0 top
R30  0  [R0805]  161,24.5 180 top
R31  270  [R0805]  161,32 0 top
R32  0  [R0805]  161,29.5 180 top
R33  270  [R0805]  161,12 0 top
R34  0  [R0805]  161,9.5 180 top
R35  10k  [R0805]  28,30 270 top
R36  10k  [R0805]  34,31 270 top
R37  10k  [R0805]  28,35 270 top
R38  10k  [R0805]  34,36 270 top
R39  270  [R0805]  59,33 90 top
R40  0  [R0805]  61.5,33 270 top
R41  270  [R0805]  61.5,27 270 top
R42  0  [R0805]  59,27 90 top
R43  220  [R0805]  26.5,19.5 90 bottom
R44  1k  [R0805]  135,119 270 top
R45  470  [R0805]  66,151 90 top
R46  0  [R0805]  72.6,131.2 180 top
R47  0  [R0805]  72.6,133.4 180 top
R48  0  [R0805]  74.2,139.8 180 top
R49  0  [R0805]  74.2,142 180 top
R50  0  [R0805]  74.6,122.8 180 top
R51  0  [R0805]  48.4,137.8 0 top
R52  0  [R0805]  48.4,135.6 0 top
R53  0  [R0805]  46.8,129.2 0 top
R54  0  [R0805]  46.8,127 0 top
R55  0  [R0805]  46.4,146.2 0 top
R56  0  [R0805]  46.8,144 0 top
R57  0  [R0805]  39.2,152.6 90 top
R58  0  [R0805]  42.4,151.2 0 top
R59  270  [R0805]  51.6,133.4 0 top
R60  270  [R0805]  50,124.8 0 top
R61  270  [R0805]  50,141.8 0 top
R62  270  [R0805]  45.6,149 0 top
R63  0  [R0805]  74.2,125 180 top
R64  0  [R0805]  81.8,116.4 270 top
R65  0  [R0805]  78.6,117.8 180 top
R66  270  [R0805]  69.4,135.6 180 top
R67  270  [R0805]  71,144.2 180 top
R68  270  [R0805]  71,127.2 180 top
R69  270  [R0805]  75.4,120 180 top
R70  0  [R0805]  142.6,131.2 180 top
R71  0  [R0805]  142.6,133.4 180 top
R72  0  [R0805]  144.2,139.8 180 top
R73  0  [R0805]  144.2,142 180 top
R74  0  [R0805]  144.6,122.8 180 top
R75  0  [R0805]  144.2,125 180 top
R76  0  [R0805]  151.8,116.4 270 top
R77  0  [R0805]  148.6,117.8 180 top
R78  270  [R0805]  139.4,135.6 180 top
R79  270  [R0805]  141,144.2 180 top
R80  270  [R0805]  141,127.2 180 top
R81  270  [R0805]  145.4,120 180 top
R82  1k  [R0805]  50,107 180 top
RASPPBERRY_PI  [2X20/90]  113,3 180 bottom
RPI  RPI-ZERO  [RASPBERRYPI_BASTELSTUBE_V13_RASPI_BOARD_B+_FULL]  59,129 180 top
S1  [SWITCH_LPV-1]  70,93 270 top
S2  TL36PO  [TL3XPO]  119,157 0 top
S3  TL36PO  [TL3XPO]  193,76 90 top
T1  [SOT23-BEC]  87,47 0 top
T2  [SOT23-BEC]  82,47 0 top
T3  [SOT23-BEC]  92,47 0 top
T4  [SOT23-BEC]  77,47 0 top
T5  [SOT23-BEC]  165,6 270 top
T6  [SOT23-BEC]  165,16 270 top
T7  [SOT23-BEC]  165,21 270 top
T8  [SOT23-BEC]  165,26 270 top
T9  [SOT23-BEC]  165,31 270 top
T10  [SOT23-BEC]  165,11 270 top
T11  [SOT23-BEC]  60.5,37 0 top
T12  [SOT23-BEC]  60,23 180 top
T13  [SOT23-BEC]  73,136.6 0 top
T14  [SOT23-BEC]  74.6,145.2 0 top
T15  [SOT23-BEC]  74.6,128.2 0 top
T16  [SOT23-BEC]  79,121.8 0 top
T17  [SOT23-BEC]  48,132.4 180 top
T18  [SOT23-BEC]  46.4,123.8 180 top
T19  [SOT23-BEC]  46.4,140.8 180 top
T20  [SOT23-BEC]  42,147.2 180 top
T21  [SOT23-BEC]  143,136.6 0 top
T22  [SOT23-BEC]  144.6,145.2 0 top
T23  [SOT23-BEC]  144.6,128.2 0 top
T24  [SOT23-BEC]  149,121.8 0 top
TOF_LP_D_AND_DISPLAY  JST-05  [GH-05-V]  45,39 90 top
TOF_LP_G  JST-05  [GH-05-V]  50,89.5 0 top
TOF_PINCE  JST-06  [GH-06-V]  45,50.5 90 top
U1  TEENSY_3.5_DIL+USB  [TEENSY_3.5_DIL+USB]  99,20 90 top
U2  TEENSY_3.1-3.2_DIL  [TEENSY_3.0-3.2&LC_DIL]  86,45 90 top
U$1  TEENSY_3.1-3.2_DIL+4  [TEENSY_3.0-3.2&LC_DIL+4]  33,40 0 top
U$2  PUSH-BUTTON  [PUSH-BUTTON]  81,85 270 top
U$3  WIZ820IO  [WIZ820]  183,29 180 top
U$4  PUSH-BUTTON  [PUSH-BUTTON]  119,113 90 top
USB_BACKUP_DEBUG  [1X03]  183,25.4 0 top
XL320_D  DYNAMIXEL-1X03XL  [DYNAMIXEL_XL_1X03]  113,91 180 bottom
XL320_G  DYNAMIXEL-1X03XL  [DYNAMIXEL_XL_1X03]  150,91 180 bottom
XL320_G1  DYNAMIXEL-1X03XL  [DYNAMIXEL_XL_1X03]  42,90 270 top
XL320_G2  DYNAMIXEL-1X03XL  [DYNAMIXEL_XL_1X03]  21,46 270 top

## Library data of the parts
ARRET_URGENCE DEL_GYRO DELS_ET_TOF_AR ENCODEUR_DROIT ENCODEUR_GAUCHE GRUE GRUE1 GYRO JUMPER LIPO LIPO1 PHARES_ET_TOF_AV TOF_LP_D_AND_DISPLAY TOF_LP_G TOF_PINCE = con-jst
AX12_D AX12_G AX12_G1 XL320_D XL320_G XL320_G1 XL320_G2 = 1NTech_pinhead
C1-C9 C11-C20 H-BRIDGE1:C1 H-BRIDGE1:C2 H-BRIDGE1:R1-H-BRIDGE1:R6 H-BRIDGE_AR_D:C1 H-BRIDGE_AR_D:C2 H-BRIDGE_AR_D:R1-H-BRIDGE_AR_D:R3 H-BRIDGE_AR_G:C1 H-BRIDGE_AR_G:C2 H-BRIDGE_AR_G:R1-H-BRIDGE_AR_G:R3 H-BRIDGE_AV_D:C1 H-BRIDGE_AV_D:C2 H-BRIDGE_AV_D:R1-H-BRIDGE_AV_D:R3 H-BRIDGE_AV_G:C1 H-BRIDGE_AV_G:C2 H-BRIDGE_AV_G:R1-H-BRIDGE_AV_G:R3 MULTI-BUTTON-1:C1 MULTI-BUTTON-1:R1-MULTI-BUTTON-1:R3 MULTI-BUTTON-2:C1 MULTI-BUTTON-2:R1-MULTI-BUTTON-2:R3 R1-R82 = resistor
C10 = 1NTech_RLCD
D1 = diode_schottky
D2 H-BRIDGE1:D1-H-BRIDGE1:D8 H-BRIDGE_AR_D:D1-H-BRIDGE_AR_D:D4 H-BRIDGE_AR_G:D1-H-BRIDGE_AR_G:D4 H-BRIDGE_AV_D:D1-H-BRIDGE_AV_D:D4 H-BRIDGE_AV_G:D1-H-BRIDGE_AV_G:D4 = diode; RS: 872-2874
DC1-DC7 = dc-dc-converter
DC-DC-6V = dc-dc-converter-6v; RS: 715-8575
DEBUG_UART MOT_AR_D MOT_AR_G MOT_AV_D MOT_AV_G MOT_H MOT_V RASPPBERRY_PI USB_BACKUP_DEBUG = pinhead
F1 = polyswitch; RS: 817-1652
F2 = polyswitch; RS: 647-8207
H-BRIDGE1:IC1 H-BRIDGE_AR_D:IC1 H-BRIDGE_AR_G:IC1 H-BRIDGE_AV_D:IC1 H-BRIDGE_AV_G:IC1 = st-microelectronics; MPN: L298N; OC_FARNELL: 1589425; OC_NEWARK: 32M1527
IC1 IC3 = burr-brown; MPN: REG1117; OC_FARNELL: 1097566; OC_NEWARK: 14P6981; RS: 885-5432
LED1-LED6 LED33-LED64 LED97-LED162 = led
MULTI-BUTTON-1:U1-MULTI-BUTTON-1:U3 MULTI-BUTTON-2:U1-MULTI-BUTTON-2:U3 = push-button; H: 4.3mm; RS: 479-1491
P1 = polyswitch; RS: 517-6966
Q1-Q4 = transistor-small-signal
RPI = RPI-Zero
S1 = switch; RS: 734-7306
S2 S3 = switch; RS: 913-9069
T1 T3 T11-T24 = transistor; RS: 781-4272
T2 T4-T10 = transistor
U1 U2 U$1 = Teensy_libSG
U$2 U$4 = push-button; RS: 479-1491
U$3 = WIZnet

## Nets
3V3@1: R82.1 RPI.1
12V_AUX: C3.1 DC3.1 S1.3
+3V3: DC1.3 DELS_ET_TOF_AR.2 JUMPER.2 PHARES_ET_TOF_AV.2 Q1.1 Q2.1 R2.1 R5.1 R6.1 R8.1 R9.1 S3.3 U1.3.3V U1.3.3V3 U2.3.3V U$3.VIN1 U$3.VIN2
+3V3_LEDS: DC2.3 T1.C T2.C T3.C T4.C T5.C T6.C T7.C T8.C T9.C T10.C
+3V3G: DC5.3 MULTI-BUTTON-1:R1.1 MULTI-BUTTON-2:R1.1 Q3.1 Q4.1 R35.1 R37.1 T11.C T12.C TOF_LP_D_AND_DISPLAY.2 TOF_LP_G.2 TOF_PINCE.2 U$1.3.3V
+5V: C11.1 ENCODEUR_DROIT.1 ENCODEUR_GAUCHE.1 H-BRIDGE_AR_D:C2.2 H-BRIDGE_AR_D:IC1.9 H-BRIDGE_AR_G:C2.2 H-BRIDGE_AR_G:IC1.9 H-BRIDGE_AV_D:C2.2 H-BRIDGE_AV_D:IC1.9 H-BRIDGE_AV_G:C2.2 H-BRIDGE_AV_G:IC1.9 IC3.2 MOT_AR_D.4 MOT_AR_G.4 MOT_AV_D.4 MOT_AV_G.4 R3.1 R7.1
+5V_RPI: DC3.3 R1.2 RASPPBERRY_PI.2 RASPPBERRY_PI.4
+5VB: DC6.3 R44.1 RPI.2 RPI.4
+5VG: C16.1 H-BRIDGE1:C2.2 H-BRIDGE1:IC1.9 IC1.2 MOT_H.4 MOT_V.4 R36.1 R38.1
+6V: C13.1 C17.1 DC-DC-6V.VOUT F1.2 XL320_G1.VCC XL320_G2.VCC
+6V5: C6.1 C7.1 DC4.3 XL320_D.VCC XL320_G.VCC
+12V: ARRET_URGENCE.7 ARRET_URGENCE.8 ARRET_URGENCE.9 ARRET_URGENCE.10 ARRET_URGENCE.11 ARRET_URGENCE.12 AX12_D.DYN_VCC AX12_G.DYN_VCC C1.1 C2.1 C4.1 C5.1 C8.1 C9.1 DC1.1 DC2.1 DC4.1 GRUE.7 GRUE.8 GRUE.9 GRUE.10 H-BRIDGE_AR_D:C1.2 H-BRIDGE_AR_D:D2.C H-BRIDGE_AR_D:D3.C H-BRIDGE_AR_D:IC1.4 H-BRIDGE_AR_G:C1.2 H-BRIDGE_AR_G:D2.C H-BRIDGE_AR_G:D3.C H-BRIDGE_AR_G:IC1.4 H-BRIDGE_AV_D:C1.2 H-BRIDGE_AV_D:D2.C H-BRIDGE_AV_D:D3.C H-BRIDGE_AV_D:IC1.4 H-BRIDGE_AV_G:C1.2 H-BRIDGE_AV_G:D2.C H-BRIDGE_AV_G:D3.C H-BRIDGE_AV_G:IC1.4 IC3.3 R11.1
+12VB: C18.2 C19.2 DC6.1 DC7.1 S2.1
+12VG: AX12_G1.DYN_VCC C12.1 C14.1 C15.1 DC5.1 DC-DC-6V.VIN GRUE1.7 GRUE1.8 GRUE1.9 GRUE1.10 IC1.3
AREF: U$1.AREF
CHOOSE_COLOR: LED3.C R4.2 S3.2 U1.A22
DEL_BLEU_1: LED134.A LED156.A LED157.A LED158.A LED159.A LED160.A LED161.A LED162.A T20.E
DEL_BLEU_1_PWM: R62.2 RPI.36
DEL_BLEU_2: LED36.A LED58.A LED59.A LED60.A LED61.A LED62.A LED63.A LED64.A T16.E
DEL_BLEU_2_PWM: R69.2 RPI.23
DEL_BLEU_3: LED102.A LED124.A LED125.A LED126.A LED127.A LED128.A LED129.A LED130.A T24.E
DEL_BLEU_3_PWM: R81.2 RPI.13
DEL_CLIGNOTANT_D: DELS_ET_TOF_AR.11 PHARES_ET_TOF_AV.9 R28.2
DEL_CLIGNOTANT_D_PWM: R27.1 U2.20/A6
DEL_CLIGNOTANT_G: DELS_ET_TOF_AR.12 PHARES_ET_TOF_AV.8 R26.2
DEL_CLIGNOTANT_G_PWM: R25.1 U2.10
DEL_FEUX_NUIT_AR: DELS_ET_TOF_AR.13 R30.2
DEL_FEUX_NUIT_AR_PWM: R29.1 U2.21/A7
DEL_FEUX_NUIT_AV: PHARES_ET_TOF_AV.10 R24.2
DEL_FEUX_NUIT_AV_PWM: R23.1 U2.9
DEL_FEUX_RECUL: DELS_ET_TOF_AR.15 R34.2
DEL_FEUX_RECUL_PWM: R33.1 U2.23/A9
DEL_FEUX_STOP: DELS_ET_TOF_AR.14 R32.2
DEL_FEUX_STOP_PWM: R31.1 U2.22/A8
DEL_GYRO_1: DEL_GYRO.2 R15.2
DEL_GYRO_1_PWM: R19.1 U2.6
DEL_GYRO_1_PWMG: R39.1 U$1.6
DEL_GYRO_1G: GYRO.1 R40.2
DEL_GYRO_2: DEL_GYRO.3 R17.2
DEL_GYRO_2_PWM: R16.1 U2.5
DEL_GYRO_2_PWMG: R41.1 U$1.20/A6
DEL_GYRO_2G: GYRO.3 R42.2
DEL_GYRO_3: DEL_GYRO.4 R20.2
DEL_GYRO_3_PWM: R18.1 U2.4
DEL_GYRO_4: DEL_GYRO.5 R22.2
DEL_GYRO_4_PWM: R21.1 U2.3
DEL_JAUNE_1: LED132.A LED149.A LED150.A LED151.A LED152.A LED153.A LED154.A LED155.A T19.E
DEL_JAUNE_1_PWM: R61.2 RPI.37
DEL_JAUNE_2: LED34.A LED51.A LED52.A LED53.A LED54.A LED55.A LED56.A LED57.A T15.E
DEL_JAUNE_2_PWM: R68.2 RPI.29
DEL_JAUNE_3: LED100.A LED117.A LED118.A LED119.A LED120.A LED121.A LED122.A LED123.A T23.E
DEL_JAUNE_3_PWM: R80.2 RPI.15
DEL_ORANGE_1: LED131.A LED135.A LED136.A LED137.A LED138.A LED139.A LED140.A LED141.A T17.E
DEL_ORANGE_1_PWM: R59.2 RPI.38
DEL_ORANGE_2: LED33.A LED37.A LED38.A LED39.A LED40.A LED41.A LED42.A LED43.A T13.E
DEL_ORANGE_2_PWM: R66.2 RPI.31
DEL_ORANGE_3: LED99.A LED103.A LED104.A LED105.A LED106.A LED107.A LED108.A LED109.A T21.E
DEL_ORANGE_3_PWM: R78.2 RPI.19
DEL_POWER: DC7.3 T13.C T14.C T15.C T16.C T17.C T18.C T19.C T20.C T21.C T22.C T23.C T24.C
DEL_VERT_1: LED133.A LED142.A LED143.A LED144.A LED145.A LED146.A LED147.A LED148.A T18.E
DEL_VERT_1_PWM: R60.2 RPI.40
DEL_VERT_2: LED35.A LED44.A LED45.A LED46.A LED47.A LED48.A LED49.A LED50.A T14.E
DEL_VERT_2_PWM: R67.2 RPI.33
DEL_VERT_3: LED101.A LED110.A LED111.A LED112.A LED113.A LED114.A LED115.A LED116.A T22.E
DEL_VERT_3_PWM: R79.2 RPI.21
ENC_AR_D_A: MOT_AR_D.5 U1.30
ENC_AR_D_B: MOT_AR_D.6 U1.38/A19
ENC_AR_G_A: MOT_AR_G.5 U1.28
ENC_AR_G_B: MOT_AR_G.6 U1.29
ENC_AV_D_A: MOT_AV_D.5 U1.26
ENC_AV_D_B: MOT_AV_D.6 U1.27
ENC_AV_G_A: MOT_AV_G.5 U1.24
ENC_AV_G_B: MOT_AV_G.6 U1.25
ENC_D_A: ENCODEUR_DROIT.3 U1.18/A4
ENC_D_B: ENCODEUR_DROIT.4 U1.39/A20
ENC_G_A: ENCODEUR_GAUCHE.3 U1.16/A2
ENC_G_B: ENCODEUR_GAUCHE.4 U1.17/A3
ETH_MISO: U1.12 U$3.MISO
ETH_MOSI: U1.11 U$3.MOSI
ETH_RST: R8.2 U1.15/A1 U$3.RESET
ETH_SCLK: U1.13 U$3.SCLK
ETH_SS: U1.10 U$3.SS
GND: AX12_D.GND AX12_G.GND C1.2 C2.2 C3.2 C4.2 C5.2 C6.2 C7.2 C8.2 C9.2 C10.- C11.2 DC1.2 DC2.2 DC3.2 DC4.2 DEL_GYRO.1 DELS_ET_TOF_AR.1 ENCODEUR_DROIT.2 ENCODEUR_GAUCHE.2 GRUE.3 GRUE.4 GRUE.5 GRUE.6 H-BRIDGE_AR_D:C1.1 H-BRIDGE_AR_D:C2.1 H-BRIDGE_AR_D:D1.A H-BRIDGE_AR_D:D4.A H-BRIDGE_AR_D:IC1.1 H-BRIDGE_AR_D:IC1.8 H-BRIDGE_AR_D:IC1.15 H-BRIDGE_AR_D:R1.2 H-BRIDGE_AR_D:R2.2 H-BRIDGE_AR_D:R3.2 H-BRIDGE_AR_G:C1.1 H-BRIDGE_AR_G:C2.1 H-BRIDGE_AR_G:D1.A H-BRIDGE_AR_G:D4.A H-BRIDGE_AR_G:IC1.1 H-BRIDGE_AR_G:IC1.8 H-BRIDGE_AR_G:IC1.15 H-BRIDGE_AR_G:R1.2 H-BRIDGE_AR_G:R2.2 H-BRIDGE_AR_G:R3.2 H-BRIDGE_AV_D:C1.1 H-BRIDGE_AV_D:C2.1 H-BRIDGE_AV_D:D1.A H-BRIDGE_AV_D:D4.A H-BRIDGE_AV_D:IC1.1 H-BRIDGE_AV_D:IC1.8 H-BRIDGE_AV_D:IC1.15 H-BRIDGE_AV_D:R1.2 H-BRIDGE_AV_D:R2.2 H-BRIDGE_AV_D:R3.2 H-BRIDGE_AV_G:C1.1 H-BRIDGE_AV_G:C2.1 H-BRIDGE_AV_G:D1.A H-BRIDGE_AV_G:D4.A H-BRIDGE_AV_G:IC1.1 H-BRIDGE_AV_G:IC1.8 H-BRIDGE_AV_G:IC1.15 H-BRIDGE_AV_G:R1.2 H-BRIDGE_AV_G:R2.2 H-BRIDGE_AV_G:R3.2 IC3.1 JUMPER.1 LED1.C LED2.C LED4.C LED5.C LED6.C LIPO.1 LIPO.2 LIPO.3 LIPO.4 LIPO.5 LIPO.6 MOT_AR_D.3 MOT_AR_G.3 MOT_AV_D.3 MOT_AV_G.3 PHARES_ET_TOF_AV.1 R12.2 RASPPBERRY_PI.6 RASPPBERRY_PI.9 RASPPBERRY_PI.14 RASPPBERRY_PI.20 RASPPBERRY_PI.25 RASPPBERRY_PI.30 RASPPBERRY_PI.34 RASPPBERRY_PI.39 S1.B S1.B1 S3.1 U1.AGND U1.GND U1.GND1 U2.AGND U2.GND U$2.1 U$2.2 U$3.GND1 U$3.GND2 U$3.GND3 U$3.PWDN USB_BACKUP_DEBUG.1 XL320_D.GND XL320_G.GND
GNDB: C18.1 C19.1 C20.1 DC6.2 DC7.2 DEBUG_UART.1 LED97.K LED98.K LIPO1.1 LIPO1.2 R46.2 R47.2 R48.2 R49.2 R50.2 R51.2 R52.2 R53.2 R54.2 R55.2 R56.2 R57.2 R58.2 R63.2 R64.2 R65.2 R70.2 R71.2 R72.2 R73.2 R74.2 R75.2 R76.2 R77.2 RPI.6 RPI.9 RPI.14 RPI.20 RPI.25 RPI.30 RPI.34 RPI.39 U$4.3 U$4.4
GNDG: AX12_G1.GND C12.2 C13.2 C14.2 C15.2 C16.2 C17.2 DC5.2 DC-DC-6V.GND GRUE1.3 GRUE1.4 GRUE1.5 GRUE1.6 GYRO.2 GYRO.4 H-BRIDGE1:C1.1 H-BRIDGE1:C2.1 H-BRIDGE1:D1.A H-BRIDGE1:D4.A H-BRIDGE1:D5.A H-BRIDGE1:D8.A H-BRIDGE1:IC1.1 H-BRIDGE1:IC1.8 H-BRIDGE1:IC1.15 H-BRIDGE1:R1.2 H-BRIDGE1:R2.2 H-BRIDGE1:R3.2 H-BRIDGE1:R4.2 H-BRIDGE1:R5.2 H-BRIDGE1:R6.2 IC1.1 MOT_H.3 MOT_V.3 MULTI-BUTTON-1:C1.1 MULTI-BUTTON-1:R2.2 MULTI-BUTTON-1:R3.2 MULTI-BUTTON-1:U3.3 MULTI-BUTTON-1:U3.4 MULTI-BUTTON-2:C1.1 MULTI-BUTTON-2:R2.2 MULTI-BUTTON-2:R3.2 MULTI-BUTTON-2:U3.3 MULTI-BUTTON-2:U3.4 R43.1 TOF_LP_D_AND_DISPLAY.1 TOF_LP_G.1 TOF_PINCE.1 U$1.AGND U$1.GND XL320_G1.GND XL320_G2.GND
GRUE_SERIAL_MISO: GRUE.2 U1.0
GRUE_SERIAL_MISOG: GRUE1.2 U$1.1
GRUE_SERIAL_MOSI: GRUE.1 U1.1
GRUE_SERIAL_MOSIG: GRUE1.1 U$1.0
JUMPER: JUMPER.3 U1.19/A5
MOT_AR_D_EN: H-BRIDGE_AR_D:IC1.6 H-BRIDGE_AR_D:IC1.11 H-BRIDGE_AR_D:R1.1 U1.35/A16
MOT_AR_D_IN1: H-BRIDGE_AR_D:IC1.5 H-BRIDGE_AR_D:IC1.12 H-BRIDGE_AR_D:R2.1 U1.36/A17
MOT_AR_D_IN2: H-BRIDGE_AR_D:IC1.7 H-BRIDGE_AR_D:IC1.10 H-BRIDGE_AR_D:R3.1 U1.37/A18
MOT_AR_D_OUT+: H-BRIDGE_AR_D:D1.C H-BRIDGE_AR_D:D2.A H-BRIDGE_AR_D:IC1.2 H-BRIDGE_AR_D:IC1.14 MOT_AR_D.1
MOT_AR_D_OUT-: H-BRIDGE_AR_D:D3.A H-BRIDGE_AR_D:D4.C H-BRIDGE_AR_D:IC1.3 H-BRIDGE_AR_D:IC1.13 MOT_AR_D.2
MOT_AR_G_EN: H-BRIDGE_AR_G:IC1.6 H-BRIDGE_AR_G:IC1.11 H-BRIDGE_AR_G:R1.1 U1.21/A7
MOT_AR_G_IN1: H-BRIDGE_AR_G:IC1.5 H-BRIDGE_AR_G:IC1.12 H-BRIDGE_AR_G:R2.1 U1.22/A8
MOT_AR_G_IN2: H-BRIDGE_AR_G:IC1.7 H-BRIDGE_AR_G:IC1.10 H-BRIDGE_AR_G:R3.1 U1.23/A9
MOT_AR_G_OUT+: H-BRIDGE_AR_G:D1.C H-BRIDGE_AR_G:D2.A H-BRIDGE_AR_G:IC1.2 H-BRIDGE_AR_G:IC1.14 MOT_AR_G.1
MOT_AR_G_OUT-: H-BRIDGE_AR_G:D3.A H-BRIDGE_AR_G:D4.C H-BRIDGE_AR_G:IC1.3 H-BRIDGE_AR_G:IC1.13 MOT_AR_G.2
MOT_AV_D_EN: H-BRIDGE_AV_D:IC1.6 H-BRIDGE_AV_D:IC1.11 H-BRIDGE_AV_D:R1.1 U1.5
MOT_AV_D_IN1: H-BRIDGE_AV_D:IC1.5 H-BRIDGE_AV_D:IC1.12 H-BRIDGE_AV_D:R2.1 U1.6
MOT_AV_D_IN2: H-BRIDGE_AV_D:IC1.7 H-BRIDGE_AV_D:IC1.10 H-BRIDGE_AV_D:R3.1 U1.9
MOT_AV_D_OUT+: H-BRIDGE_AV_D:D1.C H-BRIDGE_AV_D:D2.A H-BRIDGE_AV_D:IC1.2 H-BRIDGE_AV_D:IC1.14 MOT_AV_D.1
MOT_AV_D_OUT-: H-BRIDGE_AV_D:D3.A H-BRIDGE_AV_D:D4.C H-BRIDGE_AV_D:IC1.3 H-BRIDGE_AV_D:IC1.13 MOT_AV_D.2
MOT_AV_G_EN: H-BRIDGE_AV_G:IC1.6 H-BRIDGE_AV_G:IC1.11 H-BRIDGE_AV_G:R1.1 U1.2
MOT_AV_G_IN1: H-BRIDGE_AV_G:IC1.5 H-BRIDGE_AV_G:IC1.12 H-BRIDGE_AV_G:R2.1 U1.3
MOT_AV_G_IN2: H-BRIDGE_AV_G:IC1.7 H-BRIDGE_AV_G:IC1.10 H-BRIDGE_AV_G:R3.1 U1.4
MOT_AV_G_OUT+: H-BRIDGE_AV_G:D1.C H-BRIDGE_AV_G:D2.A H-BRIDGE_AV_G:IC1.2 H-BRIDGE_AV_G:IC1.14 MOT_AV_G.1
MOT_AV_G_OUT-: H-BRIDGE_AV_G:D3.A H-BRIDGE_AV_G:D4.C H-BRIDGE_AV_G:IC1.3 H-BRIDGE_AV_G:IC1.13 MOT_AV_G.2
MOT_H_EN: H-BRIDGE1:IC1.6 H-BRIDGE1:R1.1 U$1.3
MOT_H_ENC_A: MOT_H.5 U$1.11
MOT_H_ENC_B: MOT_H.6 U$1.12
MOT_H_IN1: H-BRIDGE1:IC1.5 H-BRIDGE1:R3.1 U$1.4
MOT_H_IN2: H-BRIDGE1:IC1.7 H-BRIDGE1:R4.1 U$1.5
MOT_H_OUT+: H-BRIDGE1:D1.C H-BRIDGE1:D2.A H-BRIDGE1:IC1.2 MOT_H.1
MOT_H_OUT-: H-BRIDGE1:D3.A H-BRIDGE1:D4.C H-BRIDGE1:IC1.3 MOT_H.2
MOT_V_EN: H-BRIDGE1:IC1.11 H-BRIDGE1:R2.1 U$1.21/A7
MOT_V_ENC_A: MOT_V.5 U$1.15/A1
MOT_V_ENC_B: MOT_V.6 U$1.16/A2
MOT_V_IN1: H-BRIDGE1:IC1.10 H-BRIDGE1:R5.1 U$1.22/A8
MOT_V_IN2: H-BRIDGE1:IC1.12 H-BRIDGE1:R6.1 U$1.23/A9
MOT_V_OUT+: H-BRIDGE1:D5.C H-BRIDGE1:D6.A H-BRIDGE1:IC1.13 MOT_V.1
MOT_V_OUT-: H-BRIDGE1:D7.A H-BRIDGE1:D8.C H-BRIDGE1:IC1.14 MOT_V.2
MULTI-BUTTON-1:N$3: MULTI-BUTTON-1:R2.1 MULTI-BUTTON-1:U2.3 MULTI-BUTTON-1:U2.4
MULTI-BUTTON-1:N$4: MULTI-BUTTON-1:R3.1 MULTI-BUTTON-1:U1.3 MULTI-BUTTON-1:U1.4
MULTI-BUTTON-2:N$3: MULTI-BUTTON-2:R2.1 MULTI-BUTTON-2:U2.3 MULTI-BUTTON-2:U2.4
MULTI-BUTTON-2:N$4: MULTI-BUTTON-2:R3.1 MULTI-BUTTON-2:U1.3 MULTI-BUTTON-2:U1.4
N$1: LED1.A R1.1
N$2: R9.2 RASPPBERRY_PI.29 U$2.3 U$2.4
N$3: ARRET_URGENCE.1 ARRET_URGENCE.2 ARRET_URGENCE.3 ARRET_URGENCE.4 ARRET_URGENCE.5 ARRET_URGENCE.6 C10.+ D1.- S1.2
N$4: D1.+1 D1.+2 P1.P$1
N$5: R10.1 RASPPBERRY_PI.31
N$6: U1.33/A14 U2.0
N$7: LED2.A R4.1
N$8: LED3.A R5.2
N$9: LIPO.7 LIPO.8 LIPO.9 LIPO.10 LIPO.11 LIPO.12 P1.P$2
N$10: U1.34/A15 U2.1
N$11: LED4.A R10.2
N$12: R11.2 R12.1 U1.A21
N$13: LED6.A R14.1
N$14: LED5.A R13.1
N$15: R13.2 U1.14/A0
N$16: R14.2 U1.20/A6
N$17: R15.1 T3.E
N$18: R19.2 T3.B
N$19: R40.1 T11.E
N$20: R39.2 T11.B
N$21: R17.1 T1.E
N$22: R16.2 T1.B
N$23: R42.1 T12.E
N$24: R41.2 T12.B
N$25: R20.1 T2.E
N$26: R18.2 T2.B
N$27: DC-DC-6V.TRIM+ R43.2
N$28: MULTI-BUTTON-1:C1.2 MULTI-BUTTON-1:R1.2 MULTI-BUTTON-1:U1.1 MULTI-BUTTON-1:U1.2 MULTI-BUTTON-1:U2.1 MULTI-BUTTON-1:U2.2 MULTI-BUTTON-1:U3.1 MULTI-BUTTON-1:U3.2 U$1.A10
N$29: R22.1 T4.E
N$30: R21.2 T4.B
N$31: MULTI-BUTTON-2:C1.2 MULTI-BUTTON-2:R1.2 MULTI-BUTTON-2:U1.1 MULTI-BUTTON-2:U1.2 MULTI-BUTTON-2:U2.1 MULTI-BUTTON-2:U2.2 MULTI-BUTTON-2:U3.1 MULTI-BUTTON-2:U3.2 U$1.A11
N$32: F1.1 H-BRIDGE1:C1.2 H-BRIDGE1:D2.C H-BRIDGE1:D3.C H-BRIDGE1:D6.C H-BRIDGE1:D7.C H-BRIDGE1:IC1.4
N$33: R24.1 T5.E
N$34: R23.2 T5.B
N$35: F2.1 LIPO1.3 LIPO1.4
N$36: D2.A F2.2
N$37: R26.1 T6.E
N$38: R25.2 T6.B
N$39: D2.C S2.2
N$40: LED97.A R44.2
N$41: R28.1 T7.E
N$42: R27.2 T7.B
N$43: LED98.A R45.2
N$44: LED33.K LED37.K LED38.K LED39.K R46.1
N$45: R30.1 T8.E
N$46: R29.2 T8.B
N$47: LED40.K LED41.K LED42.K LED43.K R47.1
N$48: LED35.K LED44.K LED45.K LED46.K R48.1
N$49: R32.1 T9.E
N$50: R31.2 T9.B
N$51: LED47.K LED48.K LED49.K LED50.K R49.1
N$52: LED34.K LED51.K LED52.K LED53.K R50.1
N$53: R34.1 T10.E
N$54: R33.2 T10.B
N$55: LED131.K LED135.K LED136.K LED137.K R51.1
N$56: LED138.K LED139.K LED140.K LED141.K R52.1
N$57: LED133.K LED142.K LED143.K LED144.K R53.1
N$58: LED145.K LED146.K LED147.K LED148.K R54.1
N$59: LED132.K LED149.K LED150.K LED151.K R55.1
N$60: LED152.K LED153.K LED154.K LED155.K R56.1
N$61: LED134.K LED156.K LED157.K LED158.K R57.1
N$62: LED159.K LED160.K LED161.K LED162.K R58.1
N$63: R59.1 T17.B
N$64: R60.1 T18.B
N$65: R61.1 T19.B
N$66: R62.1 T20.B
N$67: LED54.K LED55.K LED56.K LED57.K R63.1
N$68: LED36.K LED58.K LED59.K LED60.K R64.1
N$69: LED61.K LED62.K LED63.K LED64.K R65.1
N$70: R66.1 T13.B
N$71: R67.1 T14.B
N$72: R68.1 T15.B
N$73: R69.1 T16.B
N$74: LED99.K LED103.K LED104.K LED105.K R70.1
N$75: LED106.K LED107.K LED108.K LED109.K R71.1
N$76: LED101.K LED110.K LED111.K LED112.K R72.1
N$77: LED113.K LED114.K LED115.K LED116.K R73.1
N$78: LED100.K LED117.K LED118.K LED119.K R74.1
N$79: LED120.K LED121.K LED122.K LED123.K R75.1
N$80: LED102.K LED124.K LED125.K LED126.K R76.1
N$81: LED127.K LED128.K LED129.K LED130.K R77.1
N$82: R78.1 T21.B
N$83: R79.1 T22.B
N$84: R80.1 T23.B
N$85: R81.1 T24.B
POWEROFF: C20.2 R82.2 RPI.11 U$4.1 U$4.2
RX: DEBUG_UART.4 RPI.10
SCL: DELS_ET_TOF_AR.4 PHARES_ET_TOF_AV.4 U2.19/A5
SCLG: TOF_LP_D_AND_DISPLAY.4 TOF_LP_G.4 TOF_PINCE.4 U$1.19/A5
SDA: DELS_ET_TOF_AR.3 PHARES_ET_TOF_AV.3 U2.18/A4
SDAG: TOF_LP_D_AND_DISPLAY.3 TOF_LP_G.3 TOF_PINCE.3 U$1.18/A4
SERIAL_AX12: Q1.2 R2.2 U1.7 U1.8
SERIAL_AX12_5V: AX12_D.DATA AX12_G.DATA Q1.3 R3.2
SERIAL_AX12_5VG: AX12_G1.DATA Q3.3 R36.2
SERIAL_AX12G: Q3.2 R35.2 U$1.9 U$1.10
SERIAL_XL320: Q2.2 R6.2 U1.31/A12 U1.32/A13
SERIAL_XL320_5V: Q2.3 R7.2 XL320_D.DATA XL320_G.DATA
SERIAL_XL320_5VG: Q4.3 R38.2 XL320_G1.DATA XL320_G2.DATA
SERIAL_XL320G: Q4.2 R37.2 U$1.7 U$1.8
STATUS_LED: R45.1 RPI.35
TOF_AR_D: DELS_ET_TOF_AR.7 U2.14/A0
TOF_AR_G: DELS_ET_TOF_AR.8 U2.15/A1
TOF_AV: PHARES_ET_TOF_AV.6 U2.7
TOF_AV_D: PHARES_ET_TOF_AV.7 U2.8
TOF_AV_G: PHARES_ET_TOF_AV.5 U2.2
TOF_FLAN_AR_D: DELS_ET_TOF_AR.6 U2.12
TOF_FLAN_AR_G: DELS_ET_TOF_AR.9 U2.16/A2
TOF_FLAN_AV_D: DELS_ET_TOF_AR.5 U2.11
TOF_FLAN_AV_G: DELS_ET_TOF_AR.10 U2.17/A3
TOF_LP_D: TOF_LP_D_AND_DISPLAY.5 U$1.13
TOF_LP_G: TOF_LP_G.5 U$1.2
TOF_PINCE_EXT: TOF_PINCE.6 U$1.17/A3
TOF_PINCE_INT: TOF_PINCE.5 U$1.14/A0
TX: DEBUG_UART.5 RPI.8
USB_D+: U1.USBD+ USB_BACKUP_DEBUG.2
USB_D-: U1.USBD- USB_BACKUP_DEBUG.3
VIN: U$1.VIN
VIN1[NC]: U1.VIN
VIN2[NC]: U2.VIN
VUSB: U$1.VUSB

## Tracks (layer width: path | path; a pad name or v marks a point on that pad's centre or on a via)
3V3@1
  Top 0.3: RPI.1 50.95,104.09 R82.1
12V_AUX
  Top 0.813: S1.3 89.54,94.76 DC3.1 90.54,103 C3.1
+3V3  (via drill 0.35)
  Top 0.2: 106.48,32.28 106.4,32.35 | v105.8,28.93 106.4,28.34 106.4,17.14 105.73,16.47 105.21,16.47 104.81,16.07 104.81,15.51 105.35,14.97 U1.3.3V3
  Top 0.3: R5.1 190.9,83.84 190.9,80.64 S3.3 | U2.3.3V 80.95,59 R2.1 Q1.1 90.25,60.9 91.31,61.95 92.59,61.95 93.64,60.9 Q2.1 R6.1 | U$3.VIN2 U$3.VIN1 179.35,25.03 179.35,24.18 182.38,21.15 PHARES_ET_TOF_AV.2 | U$3.VIN2 165.63,34.08 161.11,38.6 157.93,38.6 157.7,38.83 156.2,38.83 156.17,38.86 | U$3.VIN2 175.81,37.05 R8.1 | 159.11,56 159.01,56.1 159.01,66.54 159.21,66.74 162,66.74 163.47,68.21 168.39,68.21 169.86,69.68 174.78,69.68 176.25,71.15 180.35,71.15 180.85,71.65 180.85,72.75 182.5,74.4 182.5,78.05 190.9,86.45 192.65,86.45 v193.1,86.9 194,87.8 194,90 179.19,104.81 146.34,104.81 144.53,103 v131.5,103
  Top 0.508: R9.1 74.87,25.08 U1.3.3V v74.87,33.2 74.87,36 75.76,36.89 75.76,37.87 74.57,39.06 74.57,40.31 74,40.88 74,45.49 74.3,45.8 74.3,47.12 74.57,47.39 U2.3.3V | DC1.3 186.51,53.95 184.06,53.95 182.01,56 159.11,56 159.11,52.71 156.17,49.77 156.17,38.86 156.56,38.47 156.56,37.78 156.08,37.29 155.43,37.29 150.21,32.07 150.21,31.61 149.13,30.53 145.32,30.53 144.05,29.26 140.71,29.26 140.57,29.4 122.43,29.4 122.29,29.26 118.95,29.26 117.68,30.53 113.87,30.53 113.61,30.79 107.96,30.79 106.48,32.28 | v105.39,33.19 105.56,33.19 106.4,32.35
  Bottom 0.2: v105.8,28.93 105.39,29.35 v105.39,33.19
  Bottom 0.3: DELS_ET_TOF_AR.2 124,91 128,95 130,95 131.5,96.5 JUMPER.2 v131.5,103 | v193.1,86.9 193,86.8 S3.3
  Bottom 0.508: v105.39,33.19 74.88,33.19 v74.87,33.2
+3V3_LEDS  (via drill 0.35)
  Top 0.3: T5.C T10.C T6.C T7.C T8.C T9.C 166.1,32.9 160.9,38.1 v157.4,38.1 | 155.57,38.28 155.57,50.02 158.51,52.96 158.51,66.75 159,67.24 161.79,67.24 163.26,68.71 168.18,68.71 169.65,70.18 174.57,70.18 176.04,71.65 180.14,71.65 180.35,71.86 180.35,72.96 182,74.61 182,78.26 192.54,88.8 DC2.3 | 155.57,38.28 149.61,32.32 149.61,31.86 148.88,31.13 145.07,31.13 143.8,29.86 140.96,29.86 140.82,30 122.18,30 122.04,29.86 119.2,29.86 117.93,31.13 114.12,31.13 113.86,31.39 108.21,31.39 106.02,33.59 106.02,47.5 105.84,47.68 v105.79,47.68 | 155.57,38.28 v155.73,38.12 | v93.2,48 93.1,48.1 T3.C 91,48.1 v90.9,48.2 | T4.C 78,48.1 v78.1,48.2 | v80.9,48.2 81,48.1 T2.C 83,48.1 v83.1,48.2 | v85.9,48.2 86,48.1 T1.C 88,48.1 v88.1,48.2
  Bottom 0.3: v155.73,38.12 157.38,38.12 v157.4,38.1 | v105.79,47.68 93.52,47.68 v93.2,48 | v78.1,48.2 v80.9,48.2 | v83.1,48.2 v85.9,48.2 | v88.1,48.2 v90.9,48.2
+3V3G  (via drill 0.35)
  Top 0.2: Q3.1 R35.1 27.55,30.95 v26.6,30 | U$1.3.3V 41.23,51.43 41.53,51.73 44.48,51.73 v45.2,51 | 44.42,48.62 44.4,48.62 | v48.8,90.2 48.8,91.95 TOF_LP_G.2 | v35.33,37.6 35.2,37.6 34.9,37.9 33.13,37.9 32.95,37.72 32.95,37.55 32.4,37 30.95,37 Q4.1 R37.1 27.55,35.95 v26.6,35 | v38.11,37.6 42.35,37.6 TOF_LP_D_AND_DISPLAY.2 | v45.2,48.85 45.2,48.62
  Top 0.3: DC5.3 56.36,21.9 T12.C 61.15,23.05 61.59,23.05 62.6,24.05 62.6,36.45 62.09,36.95 61.45,36.95 60.4,38 | 60.4,38 T11.C 57.54,41.06 54.7,41.06 v54.2,41.56 | 60.4,38 60.15,37.75 | TOF_PINCE.2 44.4,48.62 45.2,48.62 47.98,48.62 48.4,48.2 48.4,41.48 v48.63,41.25 48.86,41.02 48.93,41.02 49.36,40.6 49.36,39.99 48.8,39.44 48.8,38.78 47.77,37.75 45.21,37.75 44.7,37.24 44.1,37.24 43.59,37.75 TOF_LP_D_AND_DISPLAY.2
  Bottom 0.2: U$1.3.3V 40.62,52.58 39.64,53.56 39.64,56.92 40.05,57.33 MULTI-BUTTON-2:R1.1 41.55,61.5 41.55,62.42 44.1,64.97 44.1,70.86 43.7,71.26 43.7,73.24 44.1,73.64 44.1,78.1 48.8,82.8 v48.8,90.2 | v35.33,37.6 v38.11,37.6 | v26.6,35 v26.6,30 | v45.2,51 v45.2,48.85
  Bottom 0.3: DC5.3 MULTI-BUTTON-1:R1.1 | v54.2,41.56 53.97,41.33 53.73,41.33 53.45,41.05 49.51,41.05 49.43,41.13 48.75,41.13 v48.63,41.25
+5V  (via drill 0.35)
  Top 0.3: R3.1 R7.1 95.05,67 v103.85,67 | MOT_AV_G.4 MOT_AR_G.4 | MOT_AV_D.4 MOT_AR_D.4 115.2,100.93 115.2,104.4 | 115.2,104.4 130.6,104.4 131.25,103.75 v144.25,103.75 | R3.1 90.95,67 | H-BRIDGE_AV_D:IC1.9 119.33,62.56 119.2,62.56 118.4,63.36 118.4,65 117.07,66.33 114.12,66.33 113.79,66 v109.3,66 | H-BRIDGE_AV_D:C2.2 v124.05,52.21 124.05,51.55 126.02,49.59 126.02,42.97 H-BRIDGE_AR_D:C2.2 | H-BRIDGE_AV_G:C2.2 v138.95,52.21 H-BRIDGE_AR_G:C2.2 | v114.2,81.9 114.2,88.78 116,90.58 116,91.42 116.01,91.42 v116.01,92.22 | 115.2,104.4 87.72,104.4 85.81,102.49 85.81,102.21 85.8,102.2 85.8,98.8 82.23,95.23 82.23,92.28 86.21,88.3 86.75,88.3 86.95,88.09 86.95,86.41 86.75,86.2 85.6,86.2 80.2,80.8 80.2,73 81.65,71.55 C11.1 81.38,68.92 IC3.2 81.41,66.95 82.77,65.6 89.65,65.6 R3.1
  Top 0.813: H-BRIDGE_AV_D:IC1.9 123.78,61.27 H-BRIDGE_AV_D:C2.2 | H-BRIDGE_AR_D:IC1.9 123.78,41.27 H-BRIDGE_AR_D:C2.2 | H-BRIDGE_AR_G:IC1.9 139.22,38.73 H-BRIDGE_AR_G:C2.2 | H-BRIDGE_AV_G:IC1.9 139.22,58.73 H-BRIDGE_AV_G:C2.2
  Bottom 0.3: MOT_AR_G.4 147.52,103.75 v144.25,103.75 145.08,102.92 145.08,89.81 144.12,88.86 ENCODEUR_GAUCHE.1 | MOT_AV_D.4 114.27,94.73 116.01,92.99 v116.01,92.22 | v109.3,66 104.85,66 v103.85,67 | v124.05,52.21 v138.95,52.21 | ENCODEUR_DROIT.1 114.72,81.9 v114.2,81.9
+5V_RPI
  Top 0.61: 70.8,53.4 70.8,53.15 70.79,53.13 70.79,52.11 70.8,52.09 70.8,51.8 | 70.8,38.2 70.8,37.91 70.79,37.89 70.79,36.87 70.8,36.85 70.8,36.6 | 71,28.4 71.03,28.37 71.03,27.11 70.13,26.2 70.11,26.2 | 70.2,13.8 70.2,13.73 71.03,12.89 71.03,11.87 71,11.83 71,11.4 | R1.2 74.4,87
  Top 0.813: DC3.3 74.4,91.94 74.4,87 74.4,86.2 74.39,86.19 74.39,81.63 74.4,81.63 74.4,81.6 74.6,81.4 74.6,58.6 70.8,54.8 70.8,53.4 | 70.8,51.8 70.8,38.2 | 71,28.4 70.8,28.6 70.8,36.6 | 70.13,26.2 69.4,26.2 69.2,26 69.2,23 69.5,22.7 71.65,22.7 72.49,21.86 72.49,18.2 72.49,18.14 70.2,15.85 70.2,13.8 | 71,11.4 71,11 73,9 86.68,9 RASPPBERRY_PI.2 RASPPBERRY_PI.4
+5VB
  Top 0.3: R44.1 128.51,119.95 DC6.3
  Bottom 0.813: DC6.3 116.97,124 110.33,117.36 108.16,117.36 102.4,111.6 81,111.6 74.2,118.4 60,118.4 53,111.4 53,102 52.23,101.23 RPI.2 RPI.4
+5VG  (via drill 0.35)
  Top 0.2: R36.1 34,32.2 | 34,32.2 34,33.23 v34.29,33.51 35.05,34.28 35.05,35.82 34,36.87 R38.1 | v27.49,14.2 26.51,14.2 25.91,14.8 25.91,17.56 24.22,19.25 24.22,23.15 22.5,24.86 MOT_V.4 MOT_H.4 18.39,25.88 18.23,25.88 16.88,27.23 16.88,30.37 17.87,31.36 22.6,31.36 23.73,32.49 25.95,32.49 26.15,32.3 30.74,32.3 30.95,32.09 33.89,32.09 34,32.2 | IC1.2 34.95,69.78 C16.1 34.91,67.46 v34.91,65.89
  Bottom 0.2: H-BRIDGE1:IC1.9 34,12.35 H-BRIDGE1:C2.2 33.15,14.2 v27.49,14.2 | v34.29,33.51 34.29,37.83 34.76,38.3 34.76,38.86 34.3,39.32 34.3,40.9 33.1,42.1 33.1,61.1 34.91,62.91 v34.91,65.89
+6V  (via drill 0.35)
  Top 0.5: XL320_G2.VCC 22.65,47.65 22.65,54 24.03,55.38 27.5,55.38 30.15,58.02 30.15,83.4 36.8,90.05 C13.1 41.95,90.05 XL320_G1.VCC | v44.42,14.87 59.55,14.87 v60,15.32
  Bottom 0.2: XL320_G2.VCC 19.05,46 C17.1
  Bottom 0.5: F1.2 40.12,18.1 43.22,15 44.29,15 v44.42,14.87 | v60,15.32 62.85,18.17 62.85,90.9 61.1,92.65 44.65,92.65 XL320_G1.VCC
  Bottom 0.61: DC-DC-6V.VOUT 31.76,19.54 31.76,19.49 32.49,18.76 38.04,18.76 F1.2
+6V5  (via drill 0.35)
  Top 0.813: 149.95,90.95 XL320_G.VCC 150.22,91 151.48,92.26 152.98,92.26 154.49,90.76 159.44,90.76 v159.5,90.7 | DC4.3 180.04,98 178.6,99.44 168.34,99.44 v164.5,95.6 | C7.1 112.95,90.95 XL320_D.VCC 113.22,91 114.48,92.26 114.66,92.26 116.2,93.8 143.61,93.8 145.01,92.4 148.5,92.4 149.95,90.95 | C6.1 149.95,90.95
  Bottom 0.813: v159.5,90.7 164.4,95.6 v164.5,95.6
+12V  (via drill 0.35, 0.5, 0.8)
  Top 0.3: v90.31,78.59 90.31,77.69 H-BRIDGE_AR_D:D3.C 92.58,78.58 v94.79,78.58 | v97.21,78.6 97.21,77.79 H-BRIDGE_AV_D:D2.C 99.58,78.58 v100.89,78.58 | 104.21,77.79 H-BRIDGE_AV_D:D3.C 104.41,77.59 v104.41,79.6 104.41,79.59 104.7,79.3 | 104.61,79 105,79 | v87.79,78.6 85.6,78.6 H-BRIDGE_AR_D:D2.C | 159,80 159.45,79.55 v159.65,79.55 | v162.11,78.58 163.42,78.58 H-BRIDGE_AV_G:D2.C 165,77.81 v165.79,78.6 | v168.21,78.58 168.44,78.35 170.14,78.35 171.5,77 H-BRIDGE_AR_G:D3.C 172,77.9 v172.69,78.59 | v175.21,78.58 175.44,78.35 177.14,78.35 178.5,77 H-BRIDGE_AR_G:D2.C | R11.1 v109,46.4 | IC3.3 79.09,69.14 C9.1 78.35,69.25 77.6,70 77.6,78 v78,78.4
  Top 0.813: H-BRIDGE_AR_D:C1.2 109.13,34.92 H-BRIDGE_AR_D:IC1.4 | H-BRIDGE_AV_D:C1.2 110.13,54.92 H-BRIDGE_AV_D:IC1.4 | H-BRIDGE_AR_G:C1.2 147.59,44.95 H-BRIDGE_AR_G:IC1.4 | H-BRIDGE_AV_G:C1.2 147.59,64.95 H-BRIDGE_AV_G:IC1.4 | v151,71 152.17,71 153.39,72.23 153.39,74.25 154.14,75 157,75 158,76 H-BRIDGE_AV_G:D3.C 158,79 159,80 159,84 | 158,84 AX12_G.DYN_VCC 159,84 | v169.72,84 169.72,88.72 171,90 176,90 | 176,90 179.95,90 C2.1 186.41,90.05 DC2.1 | 176,90 176.05,90.05 C4.1 175.46,94.59 DC4.1 | 159,84 160.05,84 C8.1 160.15,84 v162.7,84 | DC1.1 185.59,57.54 C1.1 161.05,56.95 v160,58 | AX12_D.DYN_VCC 104.7,84 | 104.7,84 102.95,84 C5.1 | 104.7,84 104.7,79.3 105,79 111,79 112,78 v112,70
  Top 2.54: v138.81,79.81 137.62,81 130,81 120.26,71.26 118.74,71.26 117.48,70 v112,70
  Bottom 0.3: GRUE.8 GRUE.7 | v90.31,78.59 v90.3,78.6 v87.79,78.6 78.2,78.6 v78,78.4 | v94.79,78.58 97.19,78.58 v97.21,78.6 | v159.65,79.55 160.62,78.58 v162.11,78.58 | v165.79,78.6 168.19,78.6 v168.21,78.58 | v172.69,78.59 175.2,78.59 v175.21,78.58 | v109,46.4 111.6,46.4 112,46 | v100.89,78.58 100.89,79.09 102.6,80.8 103.6,80.8 104.41,79.99 v104.41,79.6
  Bottom 0.305: ARRET_URGENCE.11 ARRET_URGENCE.12 | ARRET_URGENCE.8 ARRET_URGENCE.7
  Bottom 0.813: ARRET_URGENCE.11 148.5,73.5 v151,71 | v160,58 151,58 | v169.72,84 v162.7,84
  Bottom 1.27: H-BRIDGE_AR_G:IC1.4 150.08,45.08 151,46 151,58 151,65 147.54,65 H-BRIDGE_AV_G:IC1.4 | H-BRIDGE_AR_D:IC1.4 113.08,34.92 111.6,36.4 111.6,45.6 112,46 112,55 115.46,55 H-BRIDGE_AV_D:IC1.4
  Bottom 2.54: GRUE.8 GRUE.9 GRUE.10 v138.81,79.81 143.88,74.75 ARRET_URGENCE.8 ARRET_URGENCE.9 ARRET_URGENCE.10 ARRET_URGENCE.11 151,70.12 151,65 | 112,55 v112,70
+12VB
  Top 0.3: DC6.1 134.85,124 C18.2 | C19.2 122,139.95 DC7.1
  Top 0.813: S2.1 116.46,149 DC7.1
  Bottom 0.813: DC6.1 122,131.54 DC7.1
+12VG  (via drill 0.35)
  Top 0.3: IC1.3 37.31,67.64 C15.1 v33.04,62.99 | DC5.1 59.41,16.46 C14.1 | 34,38.51 v34.07,38.58 v34.08,38.58 | GRUE1.7 42.89,26.88 43.8,25.97 43.8,21.8 v44,21.6
  Top 0.61: GRUE1.7 42.5,27.3 | 42.5,27.3 GRUE1.8 GRUE1.9 GRUE1.10 42.5,31 41.04,32.46 40.13,32.46 38.56,34.03 37.72,34.03 36.21,35.53 36.21,37.97 35.67,38.51 34,38.51 32.88,38.51 32.34,37.98 32.34,37.81 32.14,37.6 30.7,37.6 30.47,37.38 24.89,37.38 24.51,37 AX12_G1.DYN_VCC | DC-DC-6V.VIN 34.7,21.79 40.21,27.3 42.5,27.3
  Bottom 0.3: AX12_G1.DYN_VCC 22.45,37 C12.1 | v34.08,38.58 33.85,38.81 33.85,40.72 32.65,41.92 32.65,61.29 33.05,61.69 v33.05,62.98 v33.04,62.99 | v44,21.6 44.5,21.1 49.39,21.1 54.03,16.46 DC5.1
CHOOSE_COLOR  (via drill 0.35)
  Top 0.2: v155.03,9.14 155.03,12.47 v154.6,12.9 | v107.9,15.7 107.9,16.05 107.7,16.25 107.7,16.81 107.89,17 U1.A22